# Altium PCB adc_pcb_board.PcbDoc
Units mm, origin at the board's own origin, x right, y up, seen from the top; angles counter-clockwise.
Board outline 64.34 x 63.7 mm, 4 copper layers (Top Layer, Internal Plane 1, Internal Plane 2, Bottom Layer), stack 0.462 mm thick; 106 components, 77 nets, 439 pads, 78 vias.
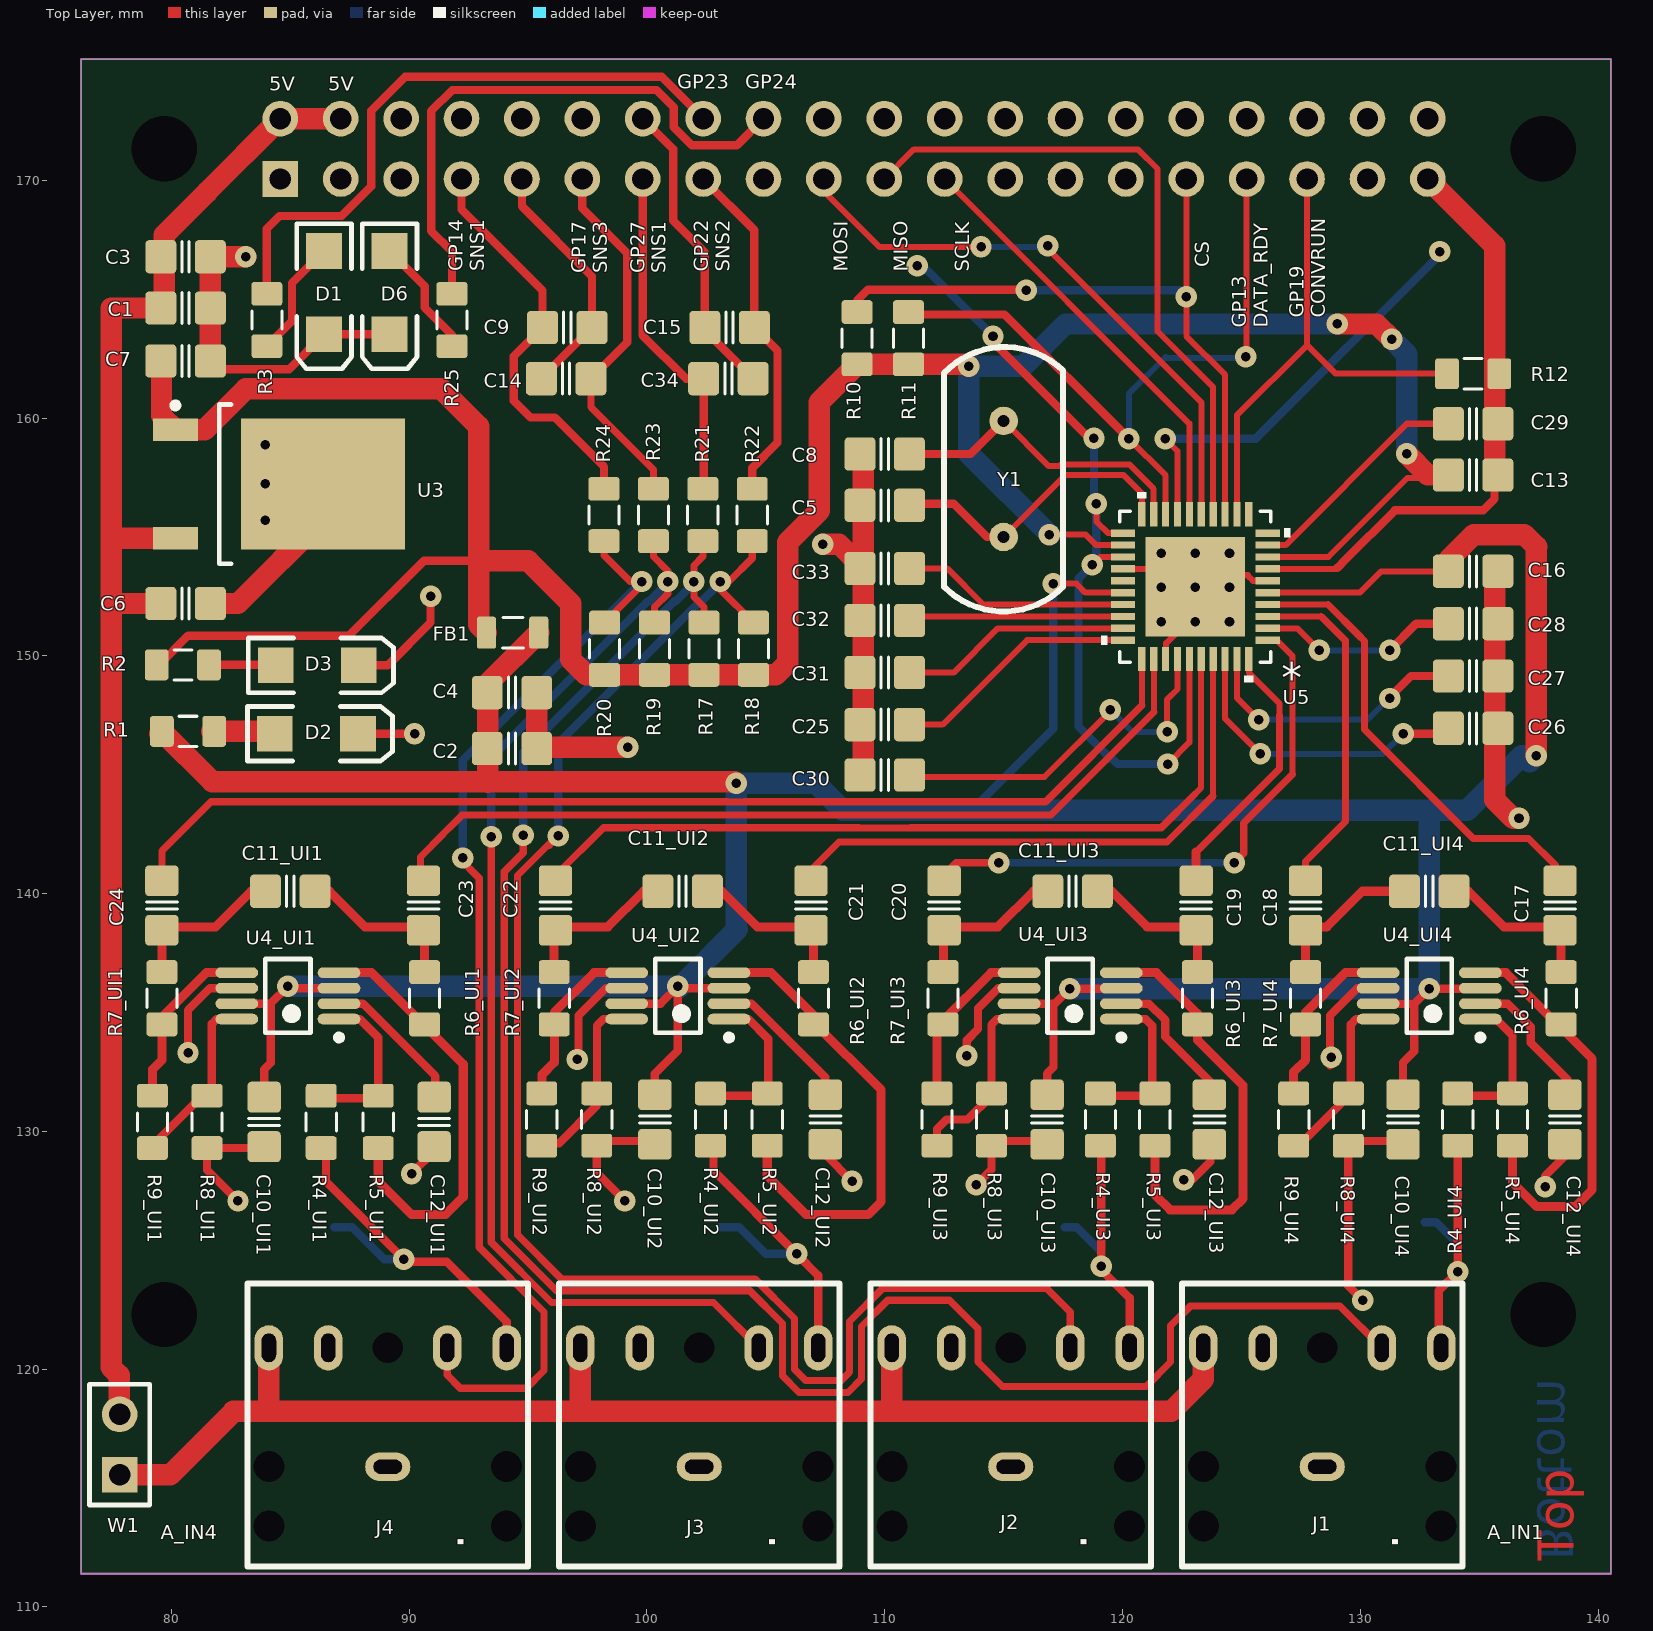
[diagram p0: Top Layer view]
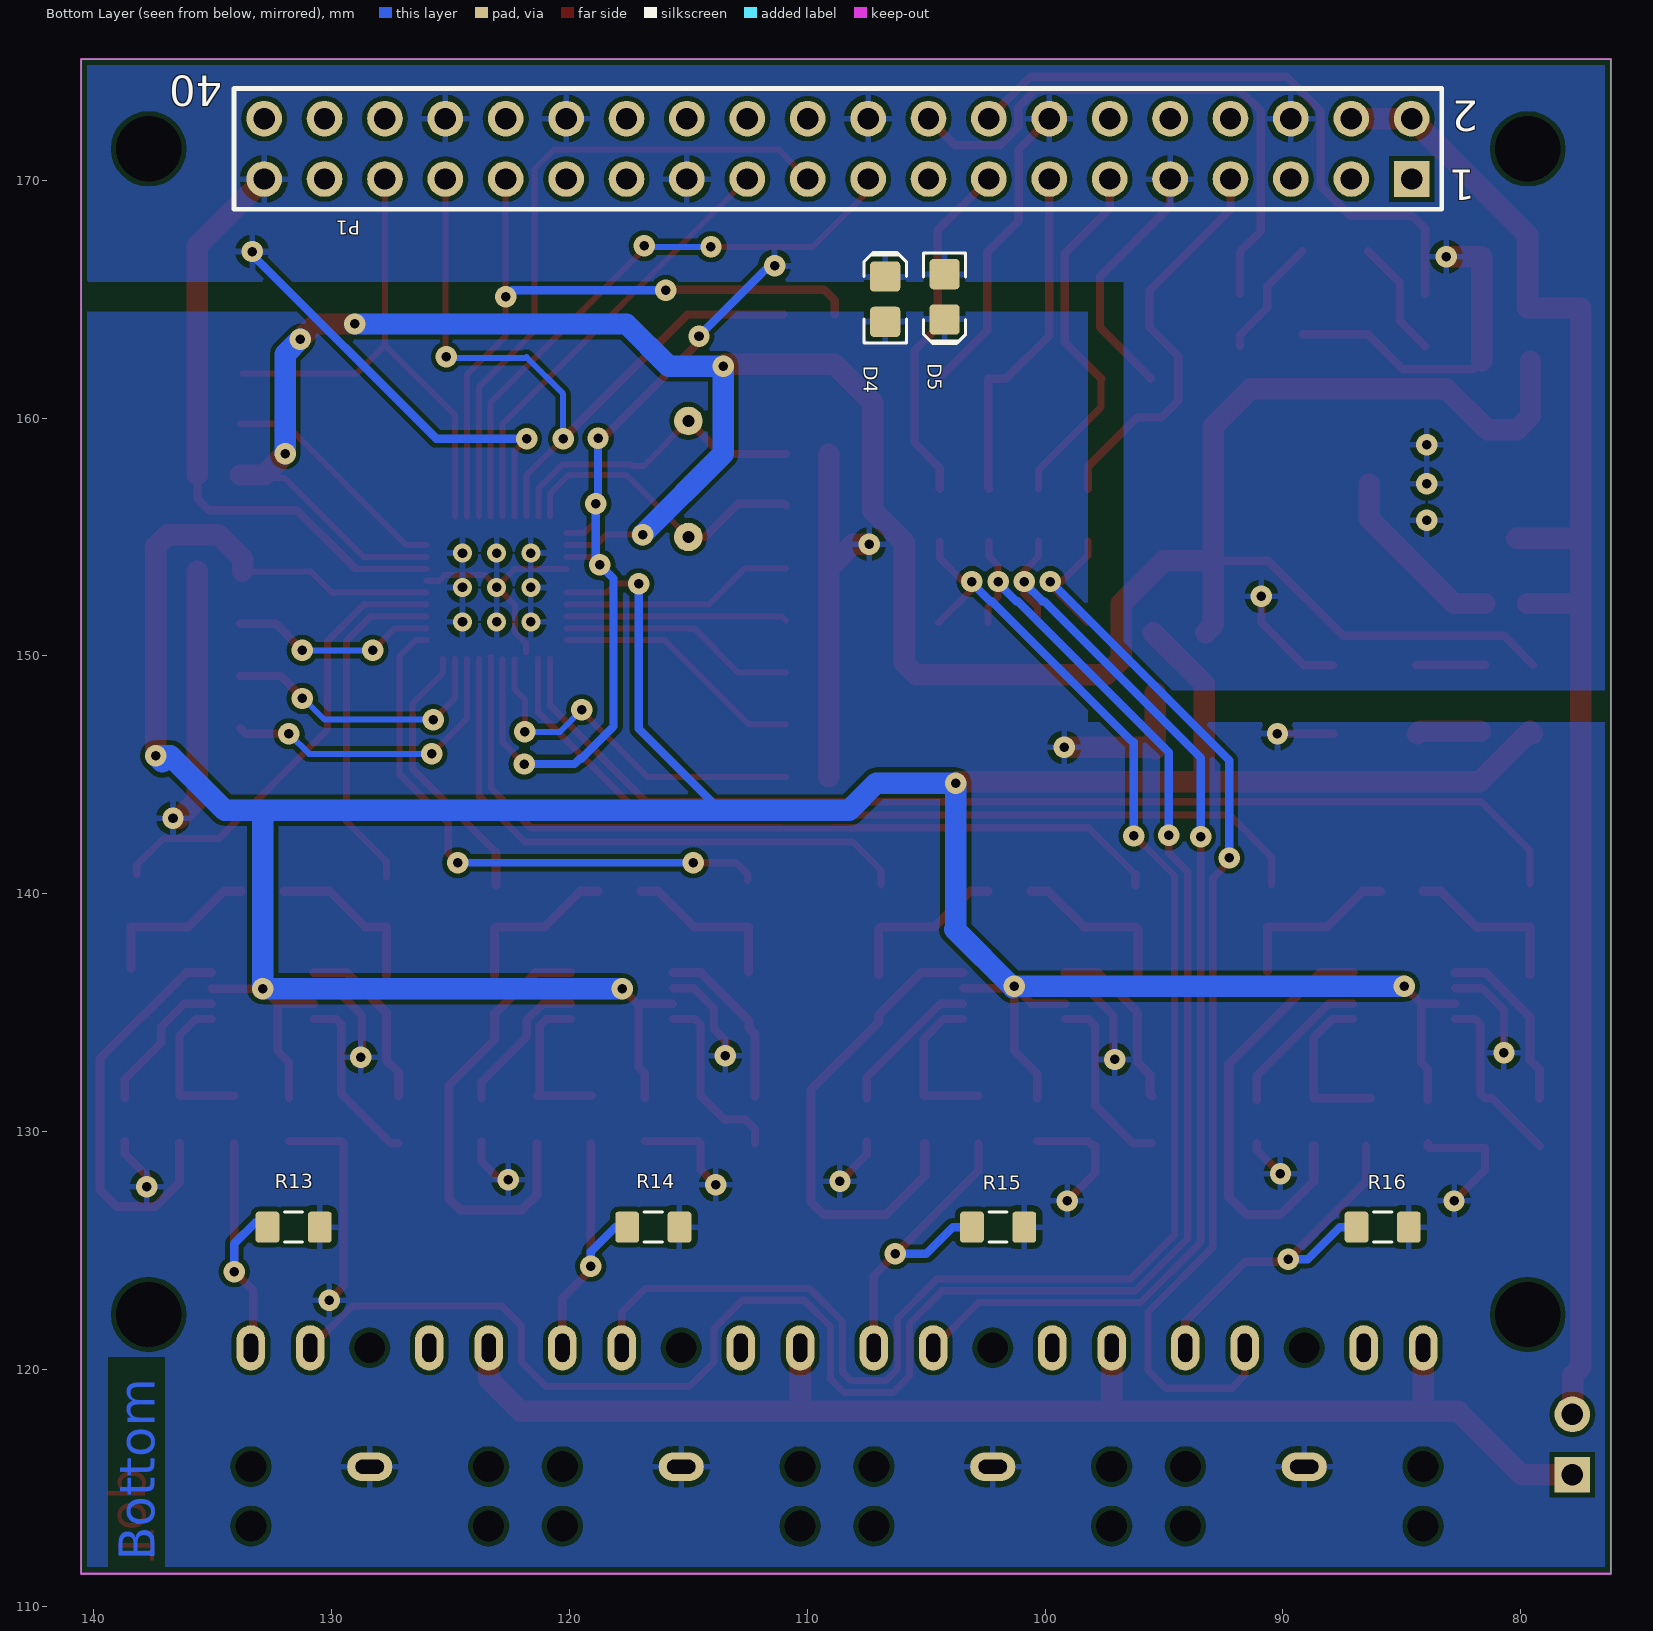
[diagram p1: Bottom Layer view, seen from below]
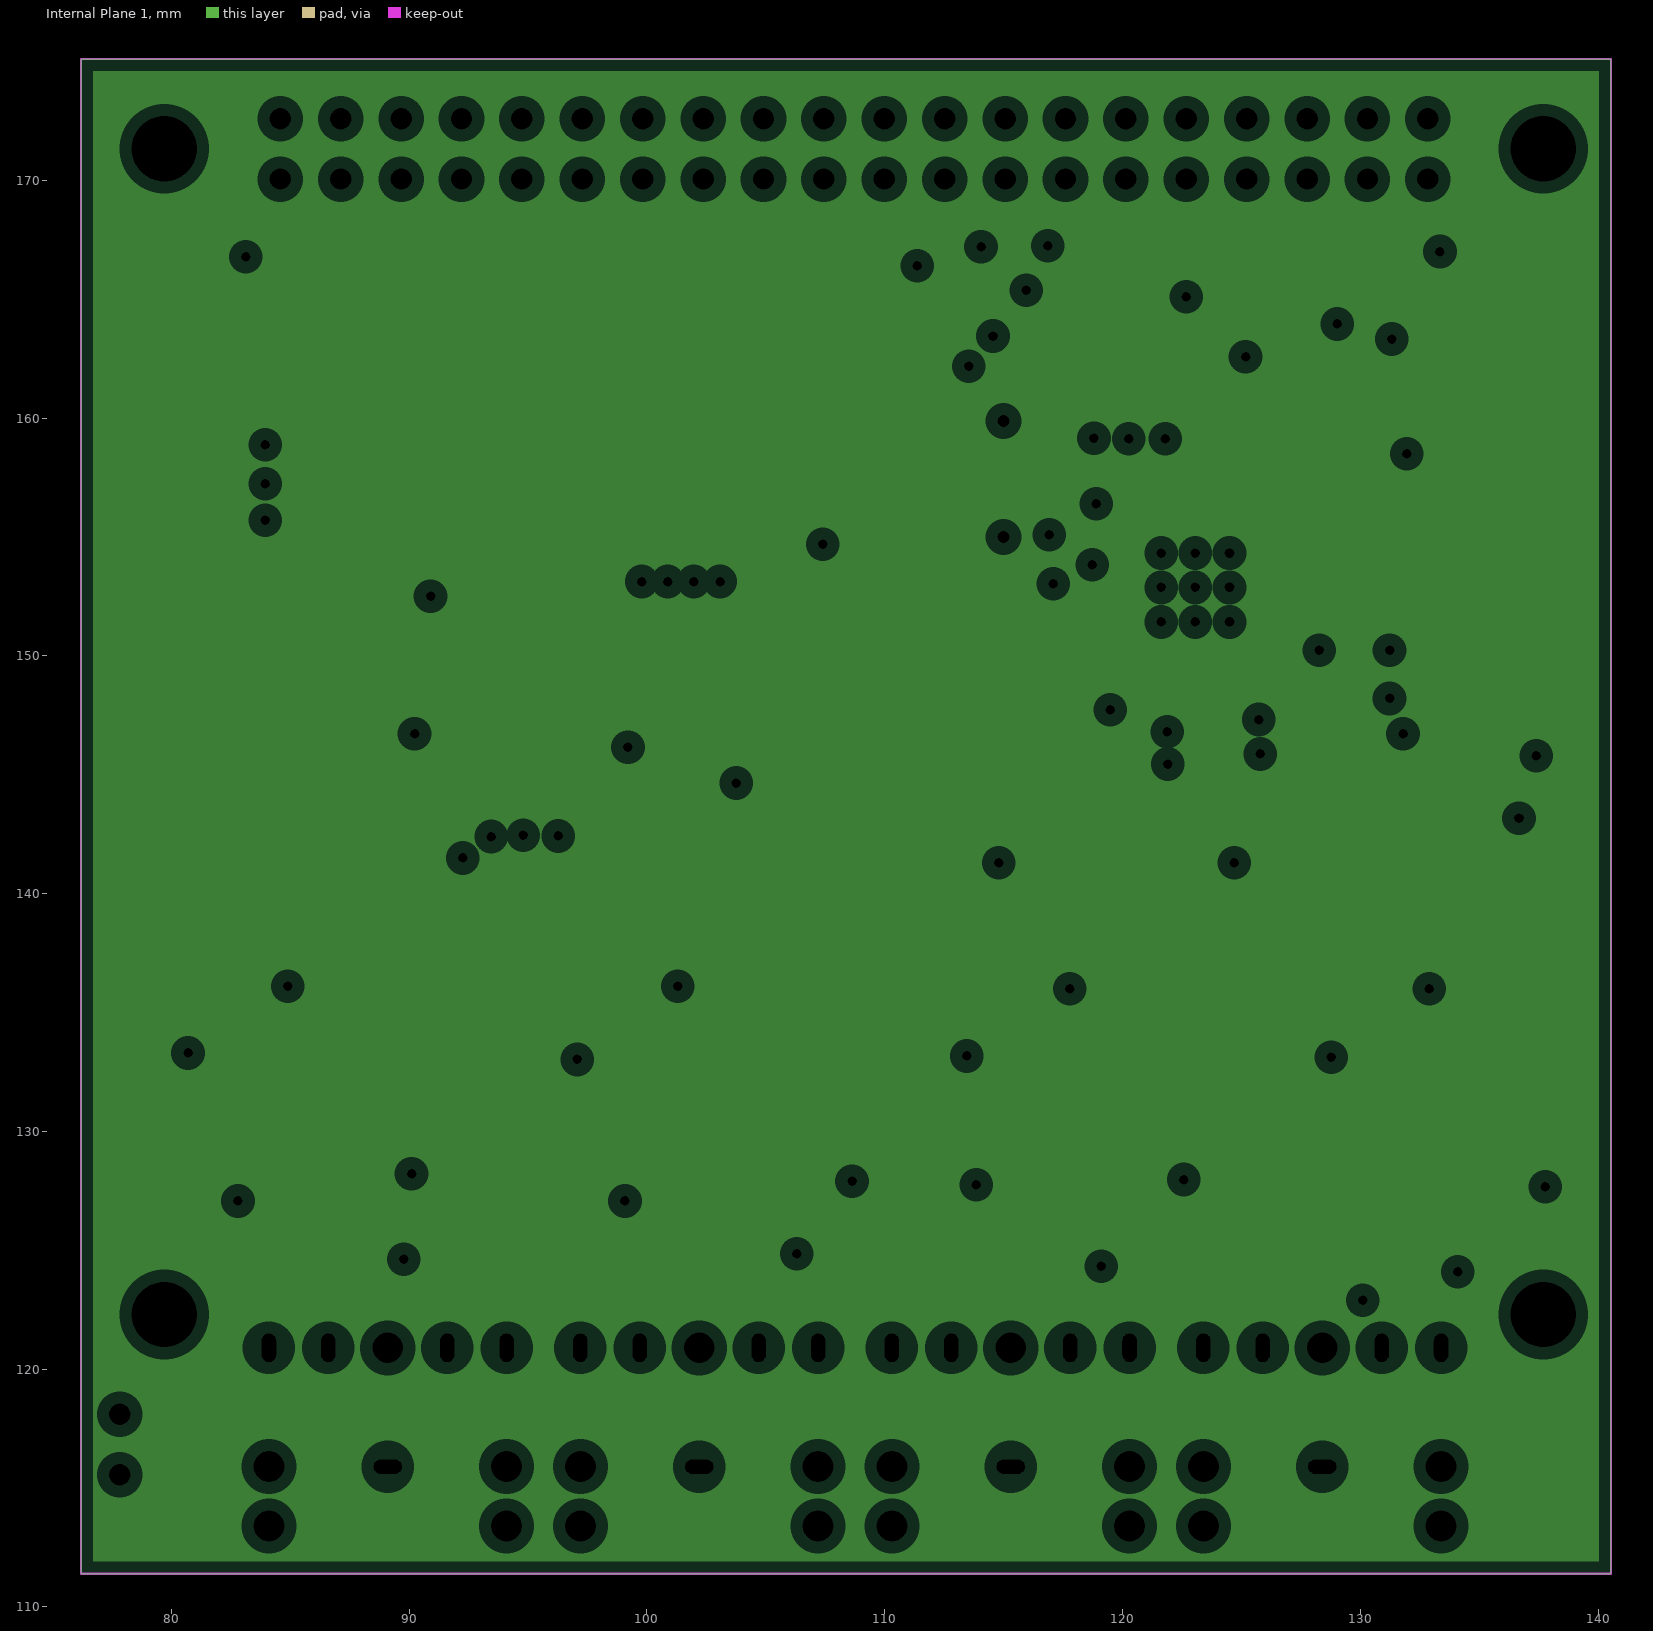
[diagram p2: Internal Plane 1, clearances drawn from the general rule]
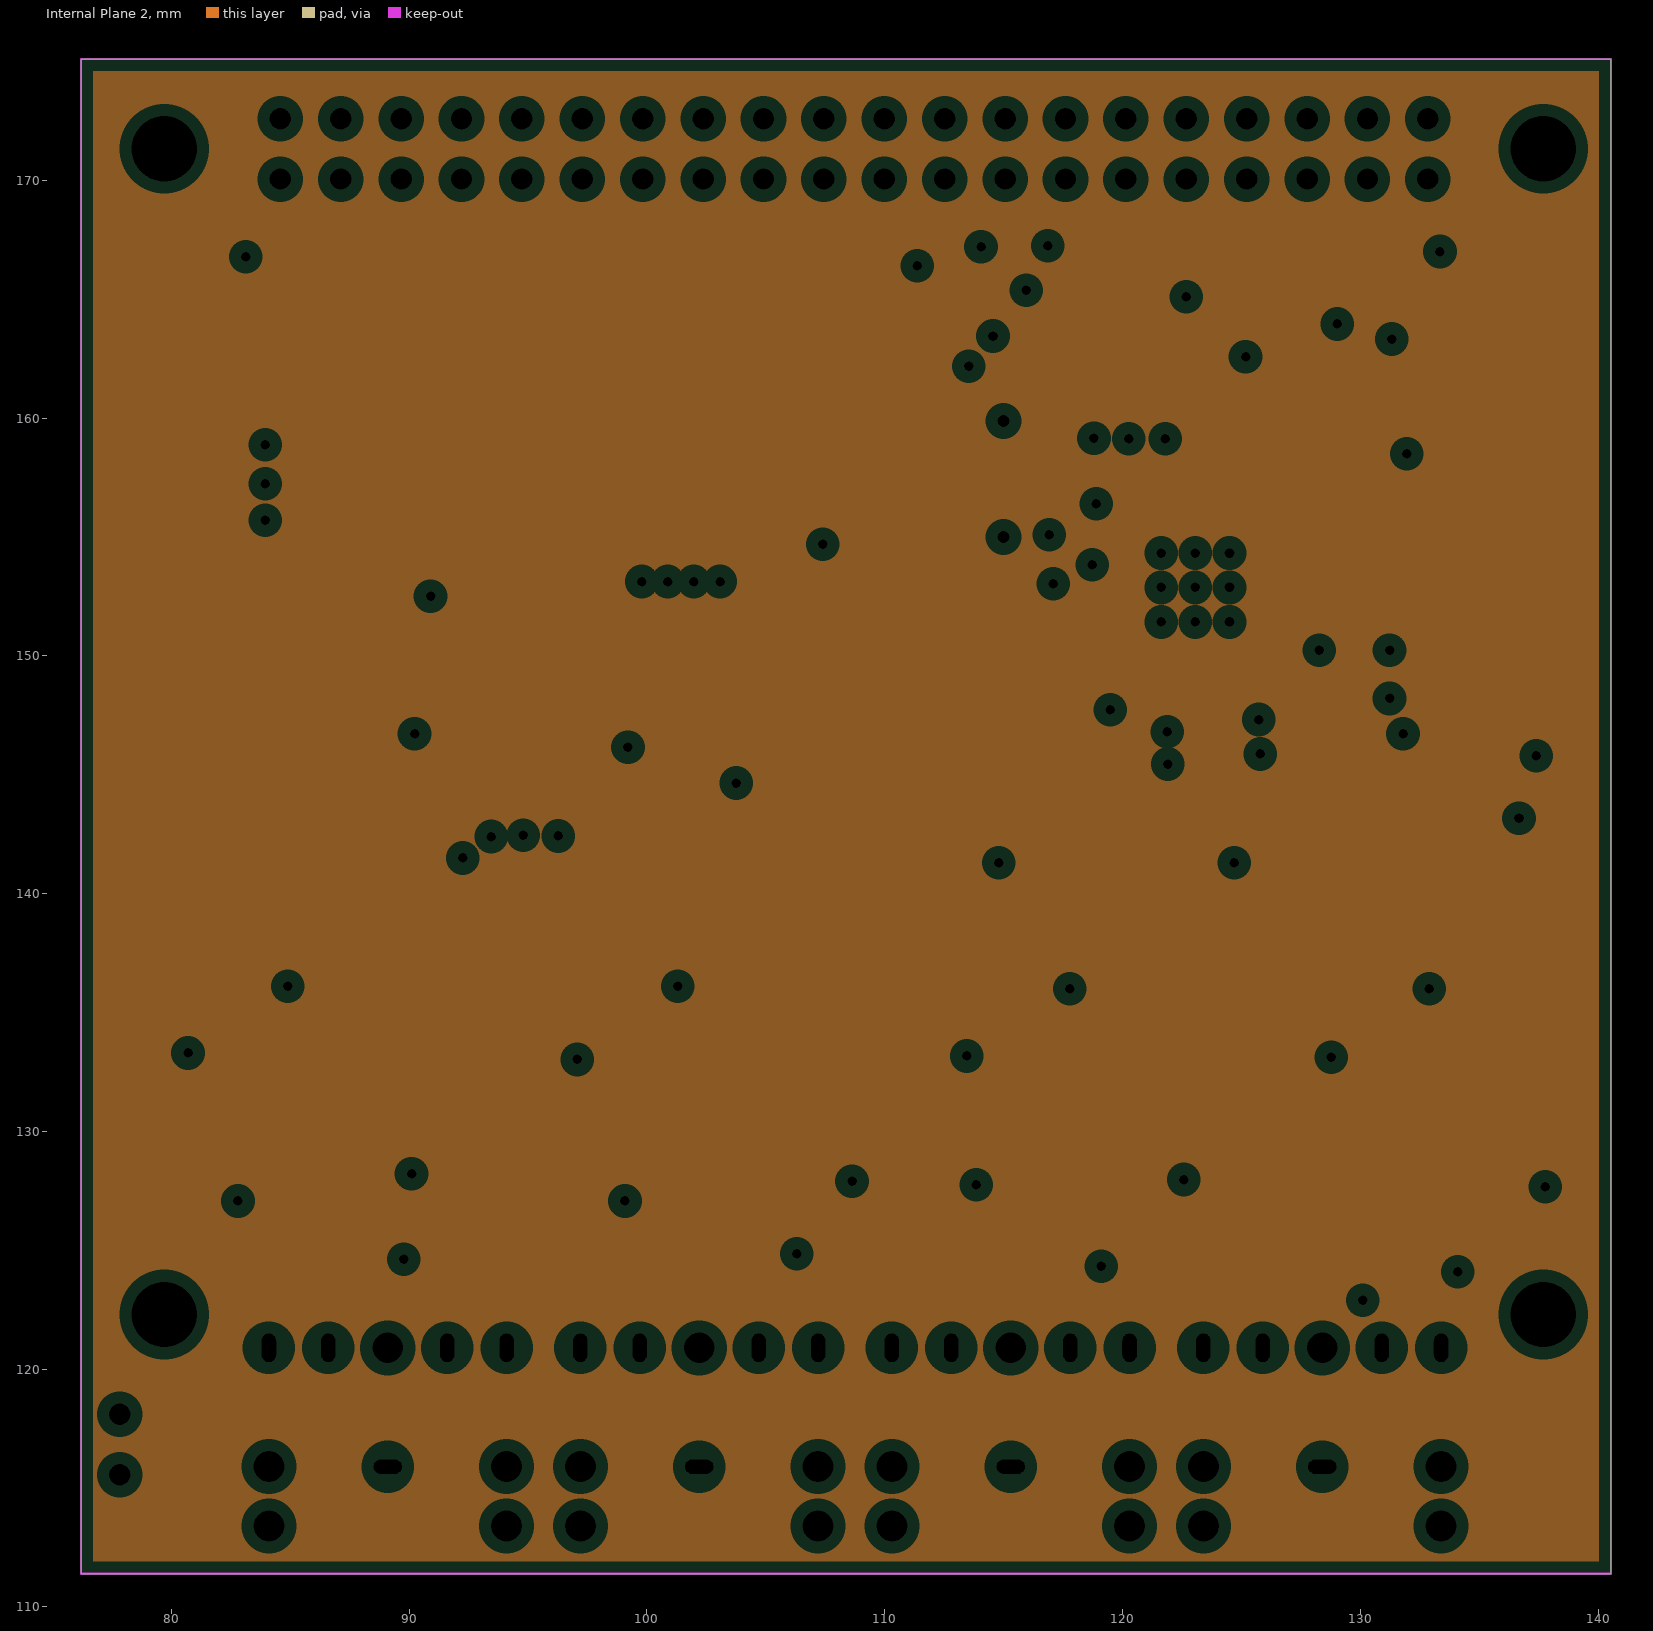
[diagram p3: Internal Plane 2, clearances drawn from the general rule]
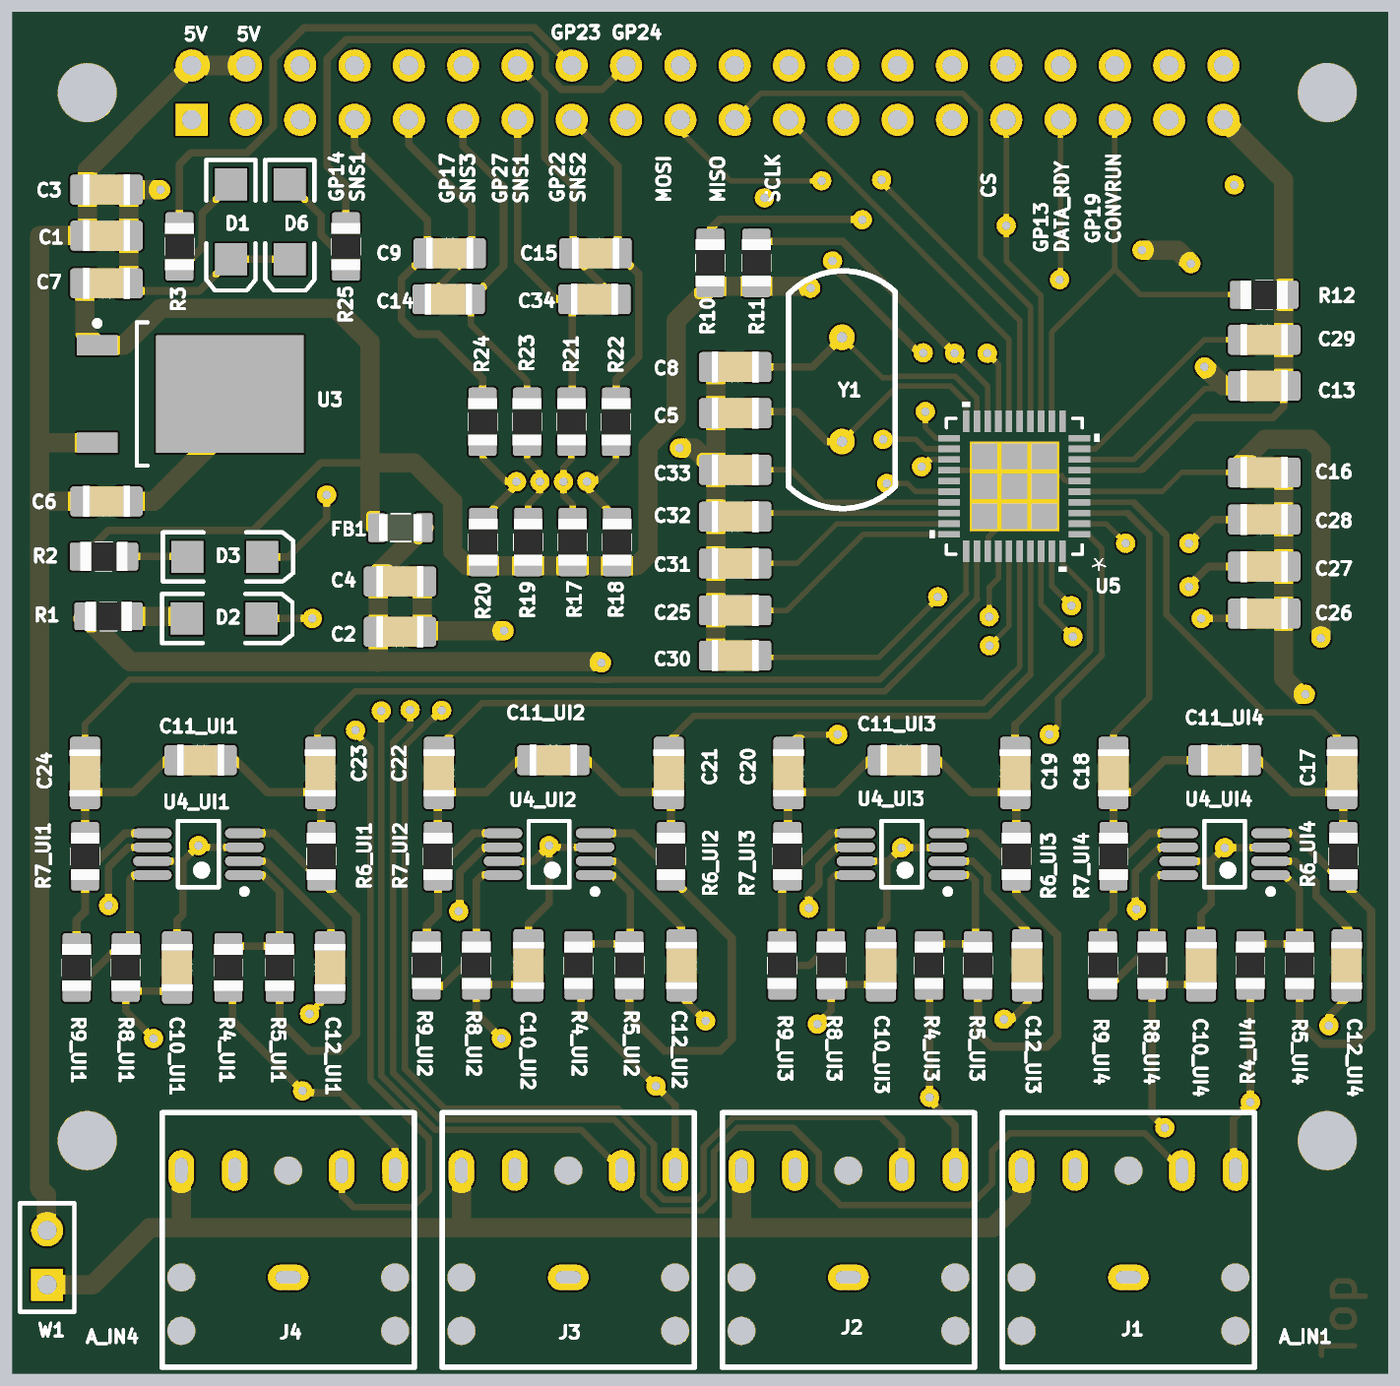
[diagram p4: 3D render of the assembled board from above, using the file's embedded part models]
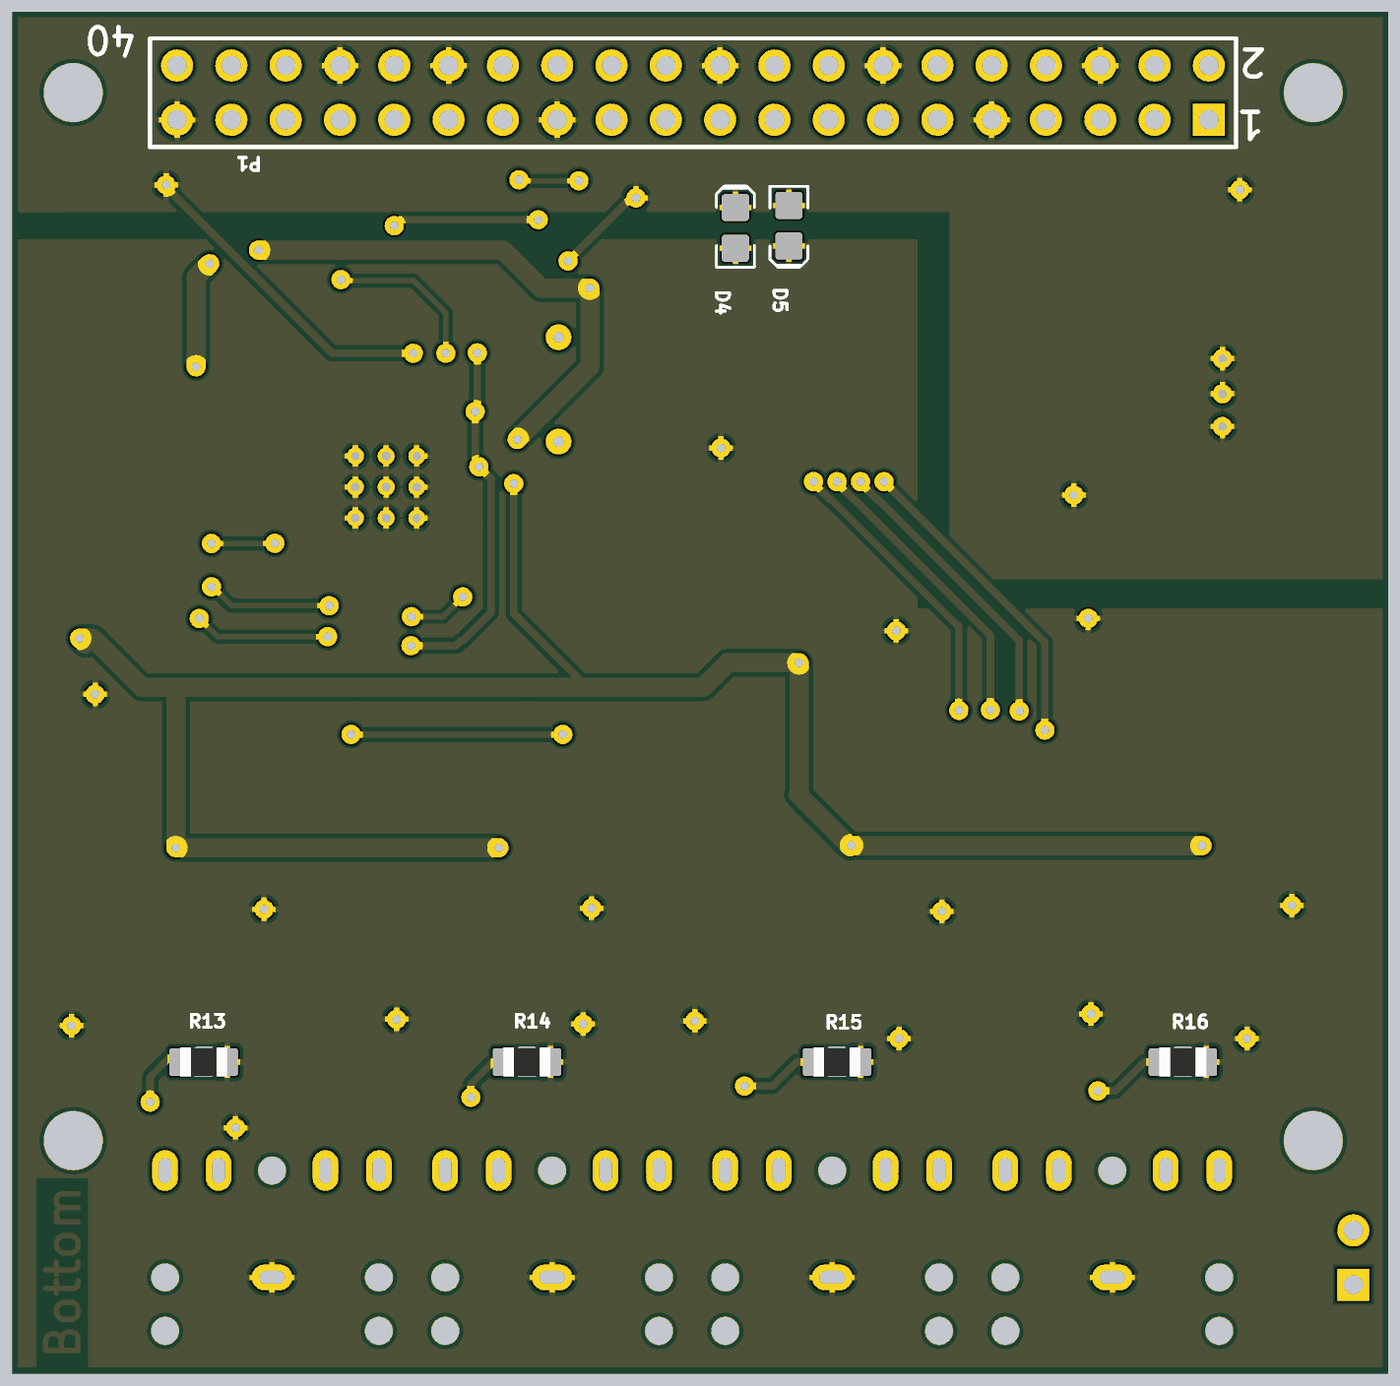
[diagram p5: 3D render of the assembled board from below, using the file's embedded part models]

## Layer stack, top to bottom
Top Solder: solder mask 0.0102, Solder Resist, Dk 3.5
Top Layer: signal copper 0.0356
Internal Plane 1: plane copper 0.0356
Internal Plane 2: plane copper 0.0356
Dielectric 1: dielectric 0.32, FR-4, Dk 4.8
Bottom Layer: signal copper 0.0356
Bottom Solder: solder mask 0.0102, Solder Resist, Dk 3.5

## Board outline
76.2,111.4 76.2,175.1 140.543,175.1 140.543,111.4

## Design rules (kind name [scope] priority, off if disabled: settings)
BoardOutlineClearance [All] p1: gap=0.127
Clearance [All] p1: gap=0.2 except(0.18: SMDPad-SMDPad)
DiffPairsRouting [All] p1: maxlimit=0.254 minlimit=0.254 mostfreqgap=0.254 toplayer_minwidth=0.254 toplayer_maxwidth=0.381 toplayer_prefwidth=0.381 bottomlayer_minwidth=0.254 bottomlayer_maxwidth=0.381 bottomlayer_prefwidth=0.381 maxuncoupledlength=12.7
Height [All] p1: minheight=0 maxheight=40 prefheight=12.7
HoleSize [All] p1: absolutevalues=TRUE maxlimit=10 minlimit=0.25 maxpercent=80.000 minpercent=20.000
MinimumAnnularRing "Minimum Annular Ring" [All] p1: minimumring=0.2
MinimumSolderMaskSliver [All] p1: minsoldermaskwidth=0.127
PlaneClearance [All] p1: clearance=0.508
PlaneConnect [All] p1: planeconnectstyle=Relief reliefexpansion=0.508 reliefentries=4 reliefconductorwidth=0.254 reliefairgap=0.254
PolygonConnect [All] p1: connectstyle=Relief reliefconductorwidth=0.254 reliefentries=4 polygonreliefangle="90 Angle" airgapwidth=0.254
RoutingVias [All] p1: holewidth=0.4 width=0.9 viastyle="Blind Buried (Adjacent Layers)" minholewidth=0.3 minwidth=0.5 maxholewidth=0.711 maxwidth=1.2
SilkToSolderMaskClearance [IsPad] p1: minsilkscreentomaskgap=0.156 clearancetoexposedcopper=TRUE
SolderMaskExpansion [All] p1: expansion=0.102
Width [All] p1: maxlimit=0.9 minlimit=0.254 preferedwidth=0.35
Width Power_lines [(InNet('A3V3') OR InNet('A5V') OR InNet('D3V3') OR InNet('A_GND') OR InNet('GND'))] p2: maxlimit=0.9 minlimit=0.5 preferedwidth=0.6
23 further rules are at their usual default settings.

## Classes and differential pairs
component class U_PowerSupply: C1 C2 C3 C4 C6 C7 D2 D3 D4 D5 FB1 R1 R2 U3
channel class InputDriver: UI1 UI2 UI3 UI4
component class UI4: C10_UI4 C11_UI4 C12_UI4 R4_UI4 R5_UI4 R6_UI4 R7_UI4 R8_UI4 R9_UI4 U4_UI4
component class UI3: C10_UI3 C11_UI3 C12_UI3 R4_UI3 R5_UI3 R6_UI3 R7_UI3 R8_UI3 R9_UI3 U4_UI3
component class UI2: C10_UI2 C11_UI2 C12_UI2 R4_UI2 R5_UI2 R6_UI2 R7_UI2 R8_UI2 R9_UI2 U4_UI2
component class UI1: C10_u1 C10_UI1 C11_UI1 C12_UI1 R4_UI1 R5_UI1 R6_UI1 R7_UI1 R8_UI1 R9_UI1 U4_UI1
component class U_ADC_connections: C5 C8 C13 C16 C17 C18 C19 C20 C21 C22 C23 C24 C25 C26 C27 C28 C29 C30 C31 C32 C33 R10 R11 R12 U5 Y1
component class TopLevel: C9 C14 C15 C34 D1 D6 J1 J2 J3 J4 P1 R3 R13 R14 R15 R16 R17 R18 R19 R20 R21 R22 R23 R24 R25 W1
differential pair AMP_UI4: +AMP_UI4_P -AMP_UI4_N
differential pair AMP_UI3: +AMP_UI3_P -AMP_UI3_N
differential pair AMP_UI2: +AMP_UI2_P -AMP_UI2_N
differential pair AMP_UI1: +AMP_UI1_P -AMP_UI1_N
differential pair D_IN: +D_IN_P -D_IN_N
differential pair C_IN: +C_IN_P -C_IN_N
differential pair B_IN: +B_IN_P -B_IN_N
differential pair A_IN: +A_IN_P -A_IN_N
differential pair ADC_IN_UI4: +ADC_IN_UI4_P -ADC_IN_UI4_N
differential pair ADC_IN_UI3: +ADC_IN_UI3_P -ADC_IN_UI3_N
differential pair ADC_IN_UI2: +ADC_IN_UI2_P -ADC_IN_UI2_N
differential pair ADC_IN_UI1: +ADC_IN_UI1_P -ADC_IN_UI1_N

## Components (designator, comment, footprint, x,y, rotation, side; value= is the part's Value field where it differs from the comment)
C1 "approved sub OK" CAPC2012X135N 80.6,164.63 r0 top
C2 "approved sub OK" CAPC2012X135N 94.325,146.1 r0 top
C3 "approved sub OK" CAPC2012X135N 80.6,166.785 r0 top
C4 "approved sub OK" CAPC2012X135N 94.325,148.454 r0 top
C5 "approved sub OK" CAPC2012X135N 110.003,156.331 r180 top
C6 "approved sub OK" CAPC2012X135N 80.6,152.2 r0 top
C7 "approved sub OK" CAPC2012X135N 80.6,162.4 r0 top
C8 "approved sub OK" CAPC2012X135N 110.003,158.486 r180 top
C9 "approved sub OK" CAPC2012X135N 96.65,163.812 r0 top
C10_UI1 "100n" CAPC2012X135N 83.9,130.4 r270 top (schematic designator C10)
C10_UI2 "100n" CAPC2012X135N 100.33,130.5 r270 top (schematic designator C10)
C10_UI3 "100n" CAPC2012X135N 116.83,130.5 r270 top (schematic designator C10)
C10_UI4 "100n" CAPC2012X135N 131.8,130.5 r270 top (schematic designator C10)
C11_UI1 "47p" CAPC2012X135N 85,140.1 r180 top (schematic designator C11)
C11_UI2 "47p" CAPC2012X135N 101.5,140.1 r180 top (schematic designator C11)
C11_UI3 "47p" CAPC2012X135N 117.9,140.1 r180 top (schematic designator C11)
C11_UI4 "47p" CAPC2012X135N 132.9,140.1 r180 top (schematic designator C11)
C12_UI1 "100n" CAPC2012X135N 91.05,130.4 r270 top (schematic designator C12)
C12_UI2 "100n" CAPC2012X135N 107.5,130.5 r270 top (schematic designator C12)
C12_UI3 "100n" CAPC2012X135N 123.65,130.5 r270 top (schematic designator C12)
C12_UI4 "100n" CAPC2012X135N 138.6,130.5 r270 top (schematic designator C12)
C13 "approved sub OK" CAPC2012X135N 134.747,157.607 r0 top
C14 "approved sub OK" CAPC2012X135N 96.6,161.658 r180 top
C15 "approved sub OK" CAPC2012X135N 103.475,163.812 r180 top
C16 "approved sub OK" CAPC2012X135N 134.747,153.554 r0 top
C17 "approved sub OK" CAPC2012X135N 138.4,139.5 r90 top
C18 "approved sub OK" CAPC2012X135N 127.7,139.5 r90 top
C19 "approved sub OK" CAPC2012X135N 123.1,139.5 r270 top
C20 "approved sub OK" CAPC2012X135N 112.5,139.5 r90 top
C21 "approved sub OK" CAPC2012X135N 106.9,139.5 r270 top
C22 "approved sub OK" CAPC2012X135N 96.15,139.5 r270 top
C23 "approved sub OK" CAPC2012X135N 90.6,139.5 r270 top
C24 "approved sub OK" CAPC2012X135N 79.6,139.5 r270 top
C25 "approved sub OK" CAPC2012X135N 110.003,147.105 r180 top
C26 "approved sub OK" CAPC2012X135N 134.747,146.955 r0 top
C27 "approved sub OK" CAPC2012X135N 134.747,149.154 r0 top
C28 "approved sub OK" CAPC2012X135N 134.747,151.354 r0 top
C29 "approved sub OK" CAPC2012X135N 134.747,159.761 r180 top
C30 "approved sub OK" CAPC2012X135N 110.003,144.989 r180 top
C31 "approved sub OK" CAPC2012X135N 110.003,149.295 r180 top
C32 "approved sub OK" CAPC2012X135N 110.003,151.486 r180 top
C33 "approved sub OK" CAPC2012X135N 110.003,153.677 r180 top
C34 "approved sub OK" CAPC2012X135N 103.425,161.658 r0 top
D1 "LED2" 3.2X1.6X1.1 86.421,165.275 r270 top
D2 "LED2" 3.2X1.6X1.1 86.1,146.725 r0 top
D3 "LED2" 3.2X1.6X1.1 86.137,149.6 r0 top
D4 "D Schottky" LED-0805-A 106.725,165 r90 bottom
D5 "D Schottky" LED-0805-A 104.225,165.1 r270 bottom
D6 "LED2" 3.2X1.6X1.1 89.175,165.275 r270 top
FB1 "220 at 100MHz" FBC2012N 94.35,150.975 r0 top
J1 "Phonejack3 TN" "SJ1-352XN FEMALE JACK" 128.4,115.9 r90 top
J2 "Phonejack3 TN" "SJ1-352XN FEMALE JACK" 115.3,115.9 r90 top
J3 "Phonejack3 TN" "SJ1-352XN FEMALE JACK" 102.2,115.9 r90 top
J4 "Phonejack3 TN" "SJ1-352XN FEMALE JACK" 89.1,115.9 r90 top
P1 "Header 20X2" HDR2X20 84.582,170.053 r0 bottom
R1 "Thick Film" RESC2012X70N 80.7,146.825 r0 top
R2 "Thick Film" RESC2012X70N 80.481,149.621 r0 top
R3 "Thick Film" RESC2012X70N 84.017,164.125 r270 top
R4_UI1 "Thick Film" RESC2012X70N 86.3,130.4 r90 top (schematic designator R4)
R4_UI2 "Thick Film" RESC2012X70N 102.67,130.5 r90 top (schematic designator R4)
R4_UI3 "Thick Film" RESC2012X70N 119.07,130.5 r90 top (schematic designator R4)
R4_UI4 "Thick Film" RESC2012X70N 134.1,130.5 r90 top (schematic designator R4)
R5_UI1 "Thick Film" RESC2012X70N 88.7,130.4 r270 top (schematic designator R5)
R5_UI2 "Thick Film" RESC2012X70N 105.06,130.5 r270 top (schematic designator R5)
R5_UI3 "Thick Film" RESC2012X70N 121.36,130.5 r270 top (schematic designator R5)
R5_UI4 "Thick Film" RESC2012X70N 136.4,130.5 r270 top (schematic designator R5)
R6_UI1 "Thick Film" RESC2012X70N 90.65,135.6 r90 top (schematic designator R6)
R6_UI2 "Thick Film" RESC2012X70N 107,135.6 r90 top (schematic designator R6)
R6_UI3 "Thick Film" RESC2012X70N 123.15,135.6 r90 top (schematic designator R6)
R6_UI4 "Thick Film" RESC2012X70N 138.45,135.6 r90 top (schematic designator R6)
R7_UI1 "Thick Film" RESC2012X70N 79.6,135.6 r90 top (schematic designator R7)
R7_UI2 "Thick Film" RESC2012X70N 96.1,135.6 r90 top (schematic designator R7)
R7_UI3 "Thick Film" RESC2012X70N 112.45,135.6 r90 top (schematic designator R7)
R7_UI4 "Thick Film" RESC2012X70N 127.7,135.6 r90 top (schematic designator R7)
R8_UI1 "Thick Film" RESC2012X70N 81.5,130.4 r90 top (schematic designator R8)
R8_UI2 "Thick Film" RESC2012X70N 97.89,130.5 r90 top (schematic designator R8)
R8_UI3 "Thick Film" RESC2012X70N 114.49,130.5 r90 top (schematic designator R8)
R8_UI4 "Thick Film" RESC2012X70N 129.5,130.5 r90 top (schematic designator R8)
R9_UI1 "Thick Film" RESC2012X70N 79.2,130.4 r90 top (schematic designator R9)
R9_UI2 "Thick Film" RESC2012X70N 95.575,130.5 r90 top (schematic designator R9)
R9_UI3 "Thick Film" RESC2012X70N 112.2,130.5 r90 top (schematic designator R9)
R9_UI4 "Thick Film" RESC2012X70N 127.2,130.5 r90 top (schematic designator R9)
R10 "Thick Film" RESC2012X70N 108.839,163.359 r90 top
R11 "Thick Film" RESC2012X70N 110.998,163.359 r90 top
R12 "Thick Film" RESC2012X70N 134.747,161.866 r0 top
R13 "Thick Film" RESC2012X70N 131.6,125.975 r180 bottom
R14 "Thick Film" RESC2012X70N 116.475,125.975 r180 bottom
R15 "Thick Film" RESC2012X70N 101.975,125.975 r180 bottom
R16 "Thick Film" RESC2012X70N 85.8,125.975 r180 bottom
R17 "Thick Film" RESC2012X70N 102.4,150.3 r90 top
R18 "Thick Film" RESC2012X70N 104.479,150.3 r90 top
R19 "Thick Film" RESC2012X70N 100.321,150.3 r90 top
R20 "Thick Film" RESC2012X70N 98.217,150.3 r90 top
R21 "Thick Film" RESC2012X70N 102.35,155.925 r270 top
R22 "Thick Film" RESC2012X70N 104.429,155.925 r270 top
R23 "Thick Film" RESC2012X70N 100.271,155.925 r270 top
R24 "Thick Film" RESC2012X70N 98.192,155.925 r270 top
R25 "Thick Film" RESC2012X70N 91.8,164.125 r270 top
U3 "LP38690DT-3.3" TD03B_N 84.518,157.226 r0 top
U4_UI1 "LT1994CMS8" LT-MS8-8_N 84.9,135.7 r180 top (schematic designator U4)
U4_UI2 "LT1994CMS8" LT-MS8-8_N 101.3,135.7 r180 top (schematic designator U4)
U4_UI3 "LT1994CMS8" LT-MS8-8_N 117.8,135.7 r180 top (schematic designator U4)
U4_UI4 "LT1994CMS8" LT-MS8-8_N 132.9,135.7 r180 top (schematic designator U4)
U5 "MAX11043ATL+" 21-0141I_T4066-5 123.063,152.908 r180 top
W1 "Jumper" HDR1X2 77.825,115.56 r90 top
Y1 "XTAL" "Quartz Crystal HC-49USSX" 115,155 r90 top

## Footprints (in the part's own frame and the unit in brackets; to place one, negate y for a bottom-side part, rotate by r counter-clockwise, add the part's x,y. Pads: shape width x height; smd on the part's side, far side on the other; paste and mask are expansions set on the pad)
3.2X1.6X1.1 [mm] "SMT LED; 2 Flat Leads"
  rect 1.5x1.5 smd: 1(-1.75,0) 2(1.75,0)
  silkscreen extent -2.9,-1.15 3.2,1.15
21-0141I_T4066-5 [mil]
  rect 39.88x12 smd paste+0 mask+0: 1(-119.92,88.58) 2(-119.92,68.9) 3(-119.92,49.21) 4(-119.92,29.53) 5(-119.92,9.84) 6(-119.92,-9.84) 7(-119.92,-29.53) 8(-119.92,-49.21) 9(-119.92,-68.9) 10(-119.92,-88.58) 21(119.92,-88.58) 22(119.92,-68.9) 23(119.92,-49.21) 24(119.92,-29.53) 25(119.92,-9.84) 26(119.92,9.84) 27(119.92,29.53) 28(119.92,49.21) 29(119.92,68.9) 30(119.92,88.58)
  rect 12x39.88 smd paste+0 mask+0: 11(-88.58,-119.92) 12(-68.9,-119.92) 13(-49.21,-119.92) 14(-29.53,-119.92) 15(-9.84,-119.92) 16(9.84,-119.92) 17(29.53,-119.92) 18(49.21,-119.92) 19(68.9,-119.92) 20(88.58,-119.92) 31(88.58,119.92) 32(68.9,119.92) 33(49.21,119.92) 34(29.53,119.92) 35(9.84,119.92) 36(-9.84,119.92) 37(-29.53,119.92) 38(-49.21,119.92) 39(-68.9,119.92) 40(-88.58,119.92)
  rect 165x165 smd paste-82 mask+0: 41(0,0)
  silkscreen extent -157,-156 156,158, body extent 0,0 10,10, height 10
CAPC2012X135N [mm] "Chip Capacitor, Body 2.0x1.2mm, EIA 0805, IPC Medium Density"
  round 0.254 on Mech15: 0(0,0)
  rrect25% 1.3x1.4 smd: 1(-1.041,0) 2(1.041,0)
  Top Layer pour cut-out: -0.675,0.7 -0.475,0.9 0.475,0.9 0.675,0.7 0.675,-0.7 0.475,-0.9 -0.475,-0.9 -0.675,-0.7
  silkscreen extent -0.15,-0.65 0.15,0.65, body extent -1.1,-0.72 1.1,0.73, height 1.34
FBC2012N [mm] "Ferrite Bead Chip, Body 2.0x1.2mm, 0805, IPC Medium Density"
  round 0.508 on Mech15: 0(0,0)
  rrect25% 0.8x1.35 smd: 1(-1.1,0) 2(1.1,0)
  silkscreen extent -0.43,-0.64 0.46,0.64, body extent -1,-0.62 1,0.63, height 0.9
HDR1X2 [mm] "Connector; Header; 2 Position"
  rect 1.5x1.5 hole 0.9: 1(0,0)
  round 1.5 hole 0.9: 2(2.54,0)
  silkscreen extent -1.27,-1.27 3.81,1.27
HDR2X20 [mm] "Connector; Header; 20x2 Position"
  rect 1.5x1.5 hole 0.9: 1(0,0)
  round 1.5 hole 0.9: 2(0,-2.54) 3(2.54,0) 4(2.54,-2.54) 5(5.08,0) 6(5.08,-2.54) 7(7.62,0) 8(7.62,-2.54) 9(10.16,0) 10(10.16,-2.54) 11(12.7,0) 12(12.7,-2.54) 13(15.24,0) 14(15.24,-2.54) 15(17.78,0) 16(17.78,-2.54) 17(20.32,0) 18(20.32,-2.54) 19(22.86,0) 20(22.86,-2.54) 21(25.4,0) 22(25.4,-2.54) 23(27.94,0) 24(27.94,-2.54) 25(30.48,0) 26(30.48,-2.54) 27(33.02,0) 28(33.02,-2.54) 29(35.56,0) 30(35.56,-2.54) 31(38.1,0) 32(38.1,-2.54) 33(40.64,0) 34(40.64,-2.54) 35(43.18,0) 36(43.18,-2.54) 37(45.72,0) 38(45.72,-2.54) 39(48.26,0) 40(48.26,-2.54)
  silkscreen extent -1.27,-3.81 49.53,1.27
LED-0805-A [mil]
  round 20 on Mech15: 0(0,0)
  rrect25% 50x50 smd: A(-37.5,0) K(37.5,0)
  Top Layer pour cut-out: -15,30 15,30 15,-30 -15,-30
  silkscreen extent -72,-35 77,35, body extent -39,-25 39,25, height 31
LT-MS8-8_N [mm] "SOP, 8-Leads, Body 3x3mm, Pitch 0.65mm, IPC Medium Density"
  oval 1.8x0.45 smd: 1(-2.15,0.975) 2(-2.15,0.325) 3(-2.15,-0.325) 4(-2.15,-0.975) 5(2.15,-0.975) 6(2.15,-0.325) 7(2.15,0.325) 8(2.15,0.975)
  silkscreen extent -2.28,-1.55 0.95,1.87, body extent -1.55,-1.55 1.55,1.55, height 1.1
"Quartz Crystal HC-49USSX" [mm]
  round 1.2 hole 0.5: 1(0,0) 2(4.88,0)
  silkscreen extent -3.13,-2.5 7.99,2.5
RESC2012X70N [mm] "Chip Resistor, Body 2.0x1.2mm, EIA 0805, IPC Medium Density"
  round 0.254 on Mech15: 0(0,0)
  rrect25% 1x1.3 smd: 1(-1.1,0) 2(1.1,0)
  Top Layer pour cut-out: -0.725,0.65 -0.525,0.85 0.525,0.85 0.725,0.65 0.725,-0.65 0.525,-0.85 -0.525,-0.85 -0.725,-0.65
  silkscreen extent -0.38,-0.64 0.38,0.64, body extent -1.1,-0.67 1.1,0.68, height 0.69
"SJ1-352XN FEMALE JACK" [mm]
  oval 1.2x1.9 hole 0.6 slot 1.2 at 90 deg: 1(0,0)
  oval 1.9x1.2 hole 0.6 slot 1.2 at 0 deg: 2(5,-5) 3(5,5) 10(5,-2.5) 11(5,2.5)
  round 0 hole 1.3: 6(5,0) 7(0,5) 8(0,-5) 9(-2.5,5) 12(-2.5,-5)
  silkscreen extent -4.2,-5.9 7.7,5.9
TD03B_N [mm] "D-PAK, 4-Leads, Body 6.1x6.6mm, Pitch 2.29mm, Lead Span 9.7mm, IPC Medium Density"
  rect 1.9x0.95 smd: 1(-4.35,2.28) 3(-4.35,-2.28)
  rect 6.9x5.5 smd: 4(1.85,0)
  silkscreen extent -4.47,-3.35 -2,3.43, body extent -2.5,-3.35 3.7,3.35, height 2.38

## Part data
C1 C2: library part CAPC_100n_0805_X7R_50V_10%, "Capacitor SMD Cer 100nF 10% 50V X7R 0805"
C3 C4 C6 C7 C13 C16 C25 C26 C27 C28 C30 C31 C32 C33: library part CAPC_1u_0805_X7R_16V_10%, "Capacitor SMD Cer 1uF 10% 16V X7R 0805"
C5 C8: library part CAPC_27p_0805_NP0_50V_5%, "Capacitor SMD Cer 22pF 5% 50V NP0 0805"
C9 C14 C15 C34: library part CAPC_100n_0805_X7R_100V_10%, "Capacitor SMD Cer 100nF 10% 100V X7R 0805"
C10_UI1 C10_UI2 C10_UI3 C10_UI4 C12_UI1 C12_UI2 C12_UI3 C12_UI4: library part CAPC_100n_0402_X5R_16V_10%, "Capacitor SMD Cer 100nF 10% 16V X5R 0402"
C11_UI1 C11_UI2 C11_UI3 C11_UI4: library part CAPC_39p_0603_NP0_50V_1%, "Capacitor SMD Cer 39pF 1% 50V NP0 0603"
C17 C18 C19 C20 C21 C22 C23 C24 C29: library part CAPC_10u_0805_10V, "Capacitor SMD Cer 10uF 10% 10V X5R 0805"
D1 D2 D3 D6: "Typical RED, GREEN, YELLOW, AMBER GaAs LED"
D4 D5: "Schottky Diode"
FB1: library part FERRITE_2K2-100MHz_0805, "Ferrite bead BLM21PG221SN1D 220 ohm at 100MHz 2A"
J1 J2 J3 J4: "Jack Socket, 1/4\" [6.5mm], Thru-Hole, Vertical, 3-Conductor with Tip closed & Ring open"
P1: "Header, 20-Pin, Dual row"
R1 R2 R3 R25: library part RES_1K3_0805_1%, "Resistor SMD chip 1.3k Ohm 0.125W 1% 0805"
R4_UI1 R4_UI2 R4_UI3 R4_UI4 R5_UI1 R5_UI2 R5_UI3 R5_UI4 R6_UI1 R6_UI2 R6_UI3 R6_UI4 R7_UI1 R7_UI2 R7_UI3 R7_UI4 R8_UI1 R8_UI2 R8_UI3 R8_UI4 R9_UI1 R9_UI2 R9_UI3 R9_UI4: library part RES_1K_0805_1%, "Resistor SMD chip 1k Ohm 0.125W 1% 0805"
R10 R11 R12 R13 R14 R15 R16: library part RES_10K_0805_1%, "Resistor SMD chip 10k Ohm 0.125W 1% 0805"
R17 R18 R19 R20: library part RES_100K_0805_1%, "Resistor SMD chip 100k Ohm 0.125W 1% 0805"
R21 R22 R23 R24: library part RES_51K_0805_1%, "Resistor SMD chip 51k Ohm 0.125W 1% 0805"
U3: "1A Low Dropout CMOS Linear Regulators, 3-pin TO-252"
U4_UI1 U4_UI2 U4_UI3 U4_UI4: "Single Channel, Low Noise, Low Distortion Fully Differential Input / Output Amplifier / Driver, 70 MHz Typical GBW, 65 V/us Typical SR, 2.375 to 12.6 V, 8-Pin SOP (MS8-8), Commercial"
U5: "Imported"
W1: "Jumper Wire"
Y1: "Crystal Oscillator"

## Free pads (board coordinates)
  round 0 hole 2.75: 0(137.7,171.323) 1(79.7,171.323) 2(79.7,122.3) 3(137.7,122.3)

## Via types
v1: diameter 0.9, hole 0.4, Top Layer to Bottom Layer, 69 vias
v2: diameter 0.8, hole 0.4, Top Layer to Bottom Layer, 9 vias

## Nets (pads, with @x,y where several pads share a name; then routed paths per layer and width w, separated by ;. In a path a pad name is that pad's centre, name@x,y a point inside that pad or via, vN(x,y) a via of type N, cw(c..) or ccw(c..) an arc to the next point about the centre after c; other vN are vias at no path point)
A3V3: C2.1 C4.1 C10_UI1.1 C10_UI2.1 C10_UI3.1 C10_UI4.1 C16.1 FB1.2 R1.1 U4_UI1.3 U4_UI1.7 U4_UI2.3 U4_UI2.7 U4_UI3.3 U4_UI3.7 U4_UI4.3 U4_UI4.7 U5.5 U5.26 | length 188.5
  Top Layer w0.254: v1(117.094,153.035) 118.065,153.035 118.442,152.658 U5.26@120.117,152.658 ; U5.5@126.009,152.658 129.979,152.658 130.875,153.554 C16.1 ; C16.1@133.628,153.335 C16.1@133.847,153.554
  Top Layer w0.35: U4_UI1.7 84.175,135.375 ; C10_UI1.1@83.9,131.3 83.9,132.6 84.175,132.875 84.175,135.375 ; U4_UI1.3 84.975,136.025 v1(84.9,136.1) 84.175,135.375 ; U4_UI2.7 100.575,135.375 v1(101.3,136.1) ; C10_UI2.1@100.33,131.4 100.33,132.43 101.3,133.4 v1(101.3,136.1) ; U4_UI2.3 101.375,136.025 v1(101.3,136.1) ; U4_UI3.7 117.1,135.375 117.1,132.7 116.83,132.43 C10_UI3.1@116.83,131.4 ; 117.162,135.375 v1(117.787,136) 119.925,136 U4_UI3.3 ; U4_UI4.7 132.275,135.375 ; C10_UI4.1@131.8,131.4 131.8,132.9 132.275,133.375 132.275,135.375 ; U4_UI4.3 135.025,136 v1(132.9,136) 132.275,135.375
  Top Layer w0.9: R1.1@79.5,146.725 R1.1 81.725,144.7 103.7,144.7 v1(103.75,144.65) ; 93.309,144.675 93.309,148.834 FB1.2 ; C16.1@133.735,153.554 133.735,154.066 134.769,155.1 136.9,155.1 137.414,154.586 137.4,154.572 v1(137.4,145.8)
  Bottom Layer w0.35: 113.665,143.51 117.094,146.939 v1(117.094,153.035)
  Bottom Layer w0.9: v1(84.9,136.1) v1(101.3,136.1) ; v1@101.35,136.05 103.8,138.5 103.75,138.55 v1(103.75,144.65) 107.1,144.65 108.24,143.51 113.665,143.51 132.9,143.51 ; v1(117.787,136) v1(132.9,136) 132.9,143.51 ; v1@137.134,145.534 v1(137.4,145.8) 136.79,145.8 134.5,143.51 132.9,143.51
A5V: C1.1 C3.1 C6.1 P1.2 P1.4 U3.3 W1.2 | length 65.8
  Top Layer w0.9: W1.2@77.65,118.1 77.8,118.25 77.8,119.75 77.475,120.075 77.475,164.63 79.7,164.63 79.7,167.7 81.5,169.5 81.5,169.511 P1.2 P1.4 ; 77.73,152.2 C6.1@79.7,152.2 ; 77.776,154.946 U3.3
A_GND: C2.2 C4.2 C5.2 C8.2 C10_UI1.2 C10_UI2.2 C10_UI3.2 C10_UI4.2 C12_UI1.2 C12_UI2.2 C12_UI3.2 C12_UI4.2 C16.2 C25.2 C26.2 C27.2 C28.2 C30.2 C31.2 C32.2 C33.2 D2.2 D4.A D5.K J1.1 J2.1 J3.1 J4.1 R8_UI1.1 R8_UI2.1 R8_UI3.1 R8_UI4.1 R13.2 R14.2 R15.2 R16.2 U4_UI1.6 U4_UI2.6 U4_UI3.6 U4_UI4.6 U5.6 U5.24 U5.33 U5.41 | length 95.5
  Top Layer w0.254: U5.24@120.117,153.658 122.313,153.658 U5.41 ; U5.33@121.834,150.17 121.834,150.534 122.3,151 122.3,152.145 U5.41 ; U5.6@126.009,153.158 125.488,153.158 125.488,153.179 125.467,153.179 125.276,153.37 125.276,153.4 123.555,153.4 U5.41
  Top Layer w0.35: v1(80.7,133.3) 80.7,135.1 81.625,136.025 U4_UI1.6 ; v1(82.8,127.075) 81.5,128.375 R8_UI1.1 83.841,129.3 C10_UI1.2 C10_UI1.2@83.9,129.5 ; D2.2 v1(90.225,146.725) ; v1(90.1,128.225) 91.1,129.225 C12_UI1.2@91.1,129.5 ; v1(97.075,133.025) 97.125,133.075 97.125,134.874 98.277,136.025 U4_UI2.6 ; R8_UI2.1 R8_UI2.1@97.89,129.3 ; v1(99.075,127.075) 97.89,128.26 R8_UI2.1@97.89,129.3 ; C10_UI2.2@100.33,129.6 98.19,129.6 R8_UI2.1@97.89,129.3 ; C12_UI2.2@107.5,129.6 107.5,129.025 v1(108.625,127.9) ; v1(113.45,133.175) 113.45,133.828 113.925,134.303 113.925,135.174 114.777,136.025 U4_UI3.6 ; v1(113.85,127.75) 114.49,128.39 R8_UI3.1 ; R8_UI3.1@114.49,129.5 114.59,129.6 C10_UI3.2@116.83,129.6 ; v1(122.575,127.975) 122.95,127.975 123.7,128.725 C12_UI3.2@123.7,129.6 ; v1(128.775,133.125) 128.775,132.825 128.725,132.775 128.725,134.874 129.877,136.025 U4_UI4.6 ; v1(130.1,122.9) 129.5,123.5 129.5,129.5 129.6,129.6 C10_UI4.2@131.8,129.6 ; v1(137.775,127.675) 137.775,128.125 138.7,129.05 C12_UI4.2@138.7,129.6
  Top Layer w0.9: C4.2 C2.2 95.416,146.15 v1(99.2,146.15) ; v1(107.4,154.7) 108.076,154.7 109.101,153.675 C33.2@109.103,153.677 ; C30.2@109.103,144.914 C33.2@109.103,153.677 ; C8.2@109.103,158.485 C33.2@109.103,153.677 ; C16.2@135.647,153.554 135.647,143.953 136.425,143.175 v1(136.675,143.175)
  other v2: 121.625,151.425 123.062,151.425 124.5,151.425 121.625,152.875 123.062,152.875 124.5,152.875 121.625,154.325 123.062,154.325 124.5,154.325
A_IN_N: C18.2 U5.3 | length 14.4
  Top Layer w0.254: U5.3@126.009,151.658 128.355,151.658
  Top Layer w0.3: C18.2@127.7,140.7 127.7,141.35 129.378,143.028 129.378,150.636 128.356,151.658
A_IN_P: C17.2 U5.4 | length 19.3
  Top Layer w0.254: U5.4@126.009,152.158 128.639,152.158
  Top Layer w0.3: 128.639,152.158 129.932,150.865 130.175,150.622 130.175,146.9 134.752,142.323 137.077,142.323 138.2,141.2 C17.2@138.2,140.8
ADC_IN_UI1_N: C11_UI1.2 C24.2 R7_UI1.2 | length 7.1
  Top Layer w0.381: R7_UI1.2@79.6,136.6 79.6,138.6 81.859,138.6 83.36,140.1 C11_UI1.2@84.1,140.1
ADC_IN_UI1_P: C11_UI1.1 C23.2 R6_UI1.2 | length 7.2
  Top Layer w0.381: C11_UI1.1@85.9,140.1 86.64,140.1 88.141,138.6 90.65,138.6 R6_UI1.2@90.65,136.75
ADC_IN_UI2_N: C11_UI2.2 C22.2 R7_UI2.2 | length 7.1
  Top Layer w0.381: R7_UI2.2@96.1,136.6 96.1,138.5 96.2,138.6 98.359,138.6 99.86,140.1 C11_UI2.2@100.6,140.1
ADC_IN_UI2_P: C11_UI2.1 C21.2 R6_UI2.2 | length 7.2
  Top Layer w0.381: C11_UI2.1@102.4,140.1 103.14,140.1 104.641,138.6 106.9,138.6 107,138.5 R6_UI2.2@107,136.6
ADC_IN_UI3_N: C11_UI3.2 C20.1 R7_UI3.2 | length 7
  Top Layer w0.381: R7_UI3.2@112.475,136.7 112.475,138.6 114.759,138.6 116.26,140.1 C11_UI3.2@117,140.1
ADC_IN_UI3_P: C11_UI3.1 C19.2 R6_UI3.2 | length 6.9
  Top Layer w0.381: C11_UI3.1@118.8,140.1 119.541,140.1 121.041,138.6 123.1,138.6 123.15,138.55 R6_UI3.2@123.15,136.6
ADC_IN_UI4_N: C11_UI4.2 C18.1 R7_UI4.2 | length 6.9
  Top Layer w0.381: R7_UI4.2@127.7,136.6 127.7,138.6 128.59,138.6 130.091,140.1 C11_UI4.2@132,140.1
ADC_IN_UI4_P: C11_UI4.1 C17.1 R6_UI4.2 | length 7
  Top Layer w0.381: C11_UI4.1@133.8,140.1 134.541,140.1 136.041,138.6 138.45,138.6 R6_UI4.2@138.45,136.85
AMP_UI1_N: R7_UI1.1 R9_UI1.2 U4_UI1.5 | length 7.5
  Top Layer w0.381: R9_UI1.2@79.2,131.4 79.2,132.6 79.6,133 79.6,134.6 79.6,134.8 81.475,136.675 U4_UI1.5
AMP_UI1_P: R5_UI1.2 R6_UI1.1 U4_UI1.4 | length 18.4
  Top Layer w0.381: U4_UI1.4 88.425,136.675 92.275,132.825 92.275,127.25 91.525,126.5 90.1,126.5 88.7,127.9 R5_UI1.2@88.7,129.4
AMP_UI2_N: R7_UI2.1 R9_UI2.2 U4_UI2.5 | length 7.5
  Top Layer w0.381: R9_UI2.2@95.5,131.5 95.588,131.587 95.588,132.388 96.108,132.908 96.108,135.008 97.775,136.675 U4_UI2.5
AMP_UI2_P: R5_UI2.2 R6_UI2.1 U4_UI2.4 | length 20.4
  Top Layer w0.381: U4_UI2.4 105.225,136.675 107,134.9 107,134.6 109.85,131.75 109.85,127.05 109.3,126.5 106.7,126.5 105.06,128.14 R5_UI2.2@105.06,129.5
AMP_UI3_N: R7_UI3.1 R9_UI3.2 U4_UI3.5 | length 7.3
  Top Layer w0.381: R9_UI3.2@112.2,131.5 112.2,134.1 112.45,134.35 112.45,134.65 114.475,136.675 U4_UI3.5
AMP_UI3_P: R5_UI3.2 R6_UI3.1 U4_UI3.4 | length 18.8
  Top Layer w0.381: U4_UI3.4 121.425,136.675 123.15,134.95 123.15,134.6 123.15,133.85 125.075,131.925 125.075,127.175 124.6,126.7 122,126.7 121.36,127.34 R5_UI3.2@121.36,129.5
AMP_UI4_N: R7_UI4.1 R9_UI4.2 U4_UI4.5 | length 7.5
  Top Layer w0.381: R9_UI4.2@127.2,131.5 127.2,132.5 127.7,133 127.7,135 129.375,136.675 U4_UI4.5
AMP_UI4_P: R5_UI4.2 R6_UI4.1 U4_UI4.4 | length 17.4
  Top Layer w0.381: U4_UI4.4 136.125,136.675 139.75,133.05 139.75,127.55 139.034,126.834 137.427,126.834 136.4,127.861 R5_UI4.2@136.4,129.5
B_IN_N: C20.2 U5.1 | length 23.8
  Top Layer w0.254: U5.1@126.009,150.658 126.479,150.658 127.154,149.983 127.154,145.021
  Top Layer w0.3: C20.2@112.515,140.556 112.5,140.571 112.5,140.8 113,141.3 v1(114.8,141.3) ; v1(124.7,141.3) 125.1,141.7 125.1,142.967 127.154,145.021
  Bottom Layer w0.3: v1(114.8,141.3) v1(124.7,141.3)
B_IN_P: C19.1 U5.40 | length 11.5
  Top Layer w0.254: U5.40 125.313,149.287 126.6,148 126.6,147.5
  Top Layer w0.3: 123.1,141.75 126.6,145.25 126.6,147.5
  Top Layer w0.381: C19.1@123.1,140.371 123.1,141.75
C_IN_N: C22.1 U5.36 | length 34.6
  Top Layer w0.254: 123.054,144.195 123.054,144.205 123.305,144.456 123.305,149.637 123.292,149.65 123.292,149.937 U5.36@123.315,149.96
  Top Layer w0.3: C22.1@96.2,140.8 98.169,142.769 108.918,142.769 ; 108.926,142.762 111.08,142.762 ; 111.088,142.769 121.629,142.769 123.054,144.195
  Top Layer w0.381: C22.1@96.2,140.371 C22.1@96.2,140.8
C_IN_P: C21.1 U5.37 | length 24.6
  Top Layer w0.254: 123.813,144.113 U5.37
  Top Layer w0.3: C21.1@106.9,140.371 106.9,141 108.075,142.175 121.875,142.175 123.813,144.113
CONVRUN: P1.35 R12.1 U5.12 | length 21.9
  Top Layer w0.254: U5.12@124.813,155.854 124.813,160.119 127.762,163.068 ; P1.35 127.762,163.068 ; R12.1@133.747,161.866 128.964,161.866 127.762,163.068
CS: P1.31 R10.2 U5.13 | length 29.6
  Top Layer w0.254: P1.31 v1(122.682,165.1) 122.682,163.449 124.313,161.818 U5.13@124.313,155.854
  Top Layer w0.35: R10.2@108.839,164.359 108.839,164.939 109.3,165.4 115.925,165.4 v1(115.95,165.375)
  Bottom Layer w0.35: v1(115.95,165.375) 122.407,165.375 v1(122.682,165.1)
D3V3: C7.1 C13.1 FB1.1 R2.1 R10.1 R11.1 R17.1 R18.1 R19.1 R20.1 U3.1 U5.8 U5.22 | length 123.7
  Top Layer w0.254: v1(116.925,155.1) 118.45,155.1 118.892,154.658 U5.22@120.117,154.658 ; U5.8@126.009,154.158 128.658,154.158 131.98,157.48 133.72,157.48 C13.1@133.847,157.607
  Top Layer w0.35: R2.1@79.481,149.621 80.708,150.848 87.473,150.848 90.625,154 92.925,154
  Top Layer w0.9: C7.1@79.584,162.4 79.584,160.09 U3.1 81.406,159.506 83.125,161.225 91.35,161.225 92.925,159.65 92.925,154 ; FB1.1 92.925,151.3 92.925,154 ; v1(113.538,162.179) 113.458,162.259 R11.1 R10.1 107.25,160.67 107.25,156.106 105.925,154.781 105.925,149.7 105.425,149.2 R18.1 R17.1 R19.1 R20.1 97.45,149.2 96.8,149.85 96.8,152.2 95,154 92.925,154 ; v1(129.032,163.957) 130.683,163.957 v1(131.318,163.322) ; v1(131.953,158.496) 132.842,157.607 C13.1@133.847,157.607
  Bottom Layer w0.9: v1(116.925,155.1) 116.934,155.1 113.538,158.496 v1(113.538,162.179) 115.824,162.179 117.602,163.957 v1(129.032,163.957) ; v1(131.318,163.322) 131.953,162.687 v1(131.953,158.496)
D_IN_N: C24.1 U5.31 | length 47.1
  Top Layer w0.254: 120.813,147.908 U5.31
  Top Layer w0.3: C24.1@79.6,140.4 79.6,141.8 81.664,143.864 103.405,143.864 103.419,143.85 104.081,143.85 104.095,143.864 116.769,143.864 120.813,147.908
D_IN_P: C23.1 U5.32 | length 36.8
  Top Layer w0.254: 121.321,147.633 U5.32@121.321,149.862
  Top Layer w0.3: C23.1@90.471,140.371 90.471,141.546 91.425,142.5 91.425,142.506 91.894,142.975 91.9,142.975 92.235,143.31 116.998,143.31 121.321,147.633
DATA_READY: P1.33 R11.2 U5.18 | length 30.3
  Top Layer w0.254: v1(120.269,159.131) 121.813,157.587 U5.18@121.813,155.854 ; v1@125.075,162.525 125.222,162.672 P1.33
  Top Layer w0.35: R11.2@110.998,164.359 115.041,164.359 v1(120.269,159.131)
  Bottom Layer w0.254: v1(120.269,159.131) 120.269,161.019 121.81,162.56 121.845,162.525 v1@125.075,162.525
  other v1: 125.175,162.575
GND: C1.2 C3.2 C6.2 C7.2 C9.2 C13.2 C14.2 C15.2 C29.1 C34.2 D1.2 D3.2 D4.K D5.A D6.2 P1.6 P1.9 P1.14 P1.20 P1.25 P1.30 P1.34 P1.39 R12.2 U3.4 U5.7 U5.17 U5.21 U5.23 U5.35 | length 129.8
  Top Layer w0.254: v1(118.725,153.825) 119.058,154.158 U5.23@120.117,154.158 ; v1(118.9,156.4) 118.9,155.65 119.392,155.158 U5.21@120.117,155.158 ; v1(121.793,159.131) 122.313,158.611 U5.17@122.313,155.854 ; v1(121.9,145.45) 122.813,146.363 U5.35 ; U5.7@126.009,153.658 128.992,153.658 129.037,153.704
  Top Layer w0.35: C7.2 81.991,162.05 84.946,162.05 D1.2 D6.2 ; D3.2 89.1,149.6 90.9,151.4 v1(90.9,152.5) ; P1.9 94.742,168.908 97.691,165.959 C9.2 95.559,161.68 C14.2 ; P1.14 101.1,171.315 101.1,168.3 102.434,166.966 C15.2 102.434,163.69 C34.2 ; v1(114.554,163.449) 114.554,163.195 118.7,159.049 v1(118.8,159.149) ; 129.037,153.704 129.385,154.051 131.454,156.121 135.166,156.121 135.647,156.602 C13.2@135.647,157.607
  Top Layer w0.9: C6.2@81.5,152.2 82.8,152.2 86.368,155.768 U3.4 ; C7.2 C1.2 C3.2 v1(83.132,166.785) ; P1.39 135.647,167.248 C13.2@135.647,157.607
  Bottom Layer w0.35: v1(111.375,166.4) 111.603,166.4 v1(114.554,163.449) ; v1(118.725,153.825) 118.15,153.25 118.15,147.026 119.507,145.669 119.538,145.7 119.787,145.45 v1(121.9,145.45) ; v1(118.8,159.149) 118.8,156.5 v1(118.9,156.4) v1@118.9,154 ; v1(121.793,159.131) 125.603,159.131 133.35,166.878 v1(133.35,167.005)
  other v1: 83.95,155.7 83.95,157.238 83.95,158.877
GP_LED1: P1.16 R3.1 | length 26.3
  Top Layer w0.35: R3.1 84.017,167.967 84.55,168.5 87.16,168.5 88.4,169.74 88.4,172.922 89.828,174.35 100.628,174.35 102.362,172.616 P1.16
GP_LED2: P1.18 R25.1 | length 24.3
  Top Layer w0.35: R25.1 91.8,167 90.925,167.875 90.925,172.907 91.818,173.8 100.4,173.8 101.125,173.075 101.125,172.239 101.896,171.468 103.777,171.468 P1.18
JACKSENSE1: C34.1 P1.13 R21.1 | length 14.5
  Top Layer w0.35: P1.13 99.822,163.478 101.642,161.658 C34.1 102.384,157.059 R21.1
JACKSENSE2: C15.1 P1.15 R22.1 | length 14.8
  Top Layer w0.35: P1.15 104.516,167.899 C15.1 105.491,162.837 105.491,158.966 104.429,157.904 R22.1
JACKSENSE3: C14.1 P1.11 R23.1 | length 15.5
  Top Layer w0.3: C14.1 97.641,160.459 100.271,157.829 R23.1
  Top Layer w0.35: P1.11 97.282,168.818 99.175,166.925 99.175,163.192 C14.1
JACKSENSE4: C9.1 P1.7 R24.1 | length 17.1
  Top Layer w0.35: P1.7 92.202,168.773 95.609,165.366 C9.1 94.4,162.603 94.4,160.725 95.1,160.025 96.125,160.025 98.192,157.958 R24.1
JACKSWITCH1: J1.10 R17.2 R21.2 | length 84
  Top Layer w0.3: v1(94.8,142.45) 94.8,141.719 94,140.919 94,125.493 96.193,123.3 104.325,123.3 105.7,121.925 105.7,119.725 106.4,119.025 108.45,119.025 109.025,119.6 109.025,121.8 110.125,122.9 112.725,122.9 113.925,121.7 113.925,120.3 114.95,119.275 121,119.275 122.025,120.3 122.025,121.825 122.85,122.65 129.15,122.65 J1.10 ; R21.2 102.35,154.175 101.975,153.8 v1(101.975,153.125) 101.975,152.475 102.4,152.05 R17.2
  Bottom Layer w0.35: v1(94.8,142.45) 94.95,142.45 94.8,142.6 94.8,145.95 101.15,152.3 101.217,152.3 101.975,153.058 v1(101.975,153.125)
JACKSWITCH2: J2.10 R18.2 R22.2 | length 67.3
  Top Layer w0.3: 95.9,142.025 95.9,142.112 94.55,140.762 94.55,125.65 96.4,123.8 104.532,123.8 106.2,122.132 106.2,120 106.675,119.525 108.175,119.525 108.525,119.875 108.525,122.007 109.918,123.4 116.8,123.4 117.8,122.4 J2.10 ; R22.2 104.429,154.104 103.45,153.125 v1(103.075,153.125) 103.075,152.804 R18.2
  Bottom Layer w0.35: v1(96.275,142.425) 96.275,146.375 96.3,146.35 102.25,152.3 102.317,152.3 103.075,153.058 v1(103.075,153.125)
JACKSWITCH3: J3.10 R19.2 R23.2 | length 48
  Top Layer w0.3: v1(93.45,142.4) 93.45,125.336 95.986,122.8 102.8,122.8 J3.10 ; R23.2 100.271,154.175 100.875,153.571 v1(100.875,153.125) 100.875,152.604 100.321,152.05 R19.2
  Bottom Layer w0.35: v1@93.45,142.267 93.45,145.7 100.05,152.3 100.117,152.3 100.875,153.058 v1(100.875,153.125)
JACKSWITCH4: J4.10 R20.2 R24.2 | length 48.7
  Top Layer w0.3: J4.10 91.6,119.75 92.15,119.2 94.925,119.2 95.675,119.95 95.675,122.404 92.95,125.129 92.95,140.65 92.1,141.5 v1(92.25,141.5) ; R24.2 98.192,154.233 99.3,153.125 v1(99.775,153.125) 99.775,152.958 R20.2
  Bottom Layer w0.35: v1(92.25,141.5) 92.25,145.6 v1(99.775,153.125)
MISO: P1.21 U5.14 | length 27.9
  Top Layer w0.254: P1.21 111.229,171.3 120.65,171.3 121.475,170.475 121.475,163.64 123.813,161.302 U5.14@123.813,155.854
MOSI: P1.19 U5.15 | length 25
  Top Layer w0.254: P1.19 107.442,169.533 109.775,167.2 v1(114.05,167.2) ; v1(116.854,167.246) 116.854,167.118 123.313,160.659 U5.15@123.313,155.854
  Bottom Layer w0.254: v1(114.05,167.2) 116.808,167.2 v1(116.854,167.246)
NetC5_1: C5.1 U5.20 Y1.1 | length 12.9
  Top Layer w0.254: Y1.1 117.6,157.6 120.05,157.6 120.813,156.837 U5.20@120.813,155.854
  Top Layer w0.35: C5.1@110.903,156.331 110.972,156.4 112.9,156.4 114.3,155 Y1.1
NetC8_1: C8.1 U5.19 Y1.2 | length 13.4
  Top Layer w0.254: Y1.2 116.899,157.981 117.339,157.981 117.412,158.054 120.285,158.054 121.313,157.026 U5.19@121.313,155.854
  Top Layer w0.35: C8.1@110.903,158.486 113.606,158.486 Y1.2
NetC12_UI1_1: C12_UI1.1 U4_UI1.2 | length 6.3
  Top Layer w0.35: U4_UI1.2 88.05,135.375 91.1,132.325 C12_UI1.1@91.1,131.3
NetC12_UI2_1: C12_UI2.1 U4_UI2.2 | length 6.2
  Top Layer w0.35: U4_UI2.2 104.4,135.375 107.5,132.275 C12_UI2.1@107.5,131.4
NetC12_UI3_1: C12_UI3.1 U4_UI3.2 | length 6.2
  Top Layer w0.35: U4_UI3.2 121.103,135.375 121.8,134.678 121.8,133.975 123.7,132.075 C12_UI3.1@123.7,131.4
NetC12_UI4_1: C12_UI4.1 U4_UI4.2 | length 6.2
  Top Layer w0.35: U4_UI4.2 136.2,135.375 137.175,134.4 137.175,133.725 138.7,132.2 C12_UI4.1@138.7,131.4
NetC25_1: C25.1 U5.30 | length 10.7
  Top Layer w0.254: C25.1@110.903,147.105 112.434,147.105 115.987,150.658 U5.30@120.117,150.658
NetC26_1: C26.1 U5.38 | length 13.1
  Top Layer w0.254: U5.38 124.313,147.362 v1(125.8,145.875)
  Top Layer w0.35: v1(131.8,146.725) 133.617,146.725 C26.1@133.847,146.955
  Bottom Layer w0.254: v1(125.8,145.875) 130.95,145.875 v1(131.8,146.725)
NetC27_1: C27.1 U5.39 | length 11.8
  Top Layer w0.254: U5.39 124.813,148.237 v1(125.73,147.32)
  Top Layer w0.35: v1(131.231,148.207) 131.231,148.249 132.136,149.154 C27.1@133.847,149.154
  Bottom Layer w0.254: v1(125.73,147.32) 130.302,147.32 131.189,148.207 v1(131.231,148.207)
NetC28_1: C28.1 U5.2 | length 8.7
  Top Layer w0.254: U5.2@126.009,151.158 127.353,151.158 v1(128.27,150.241)
  Top Layer w0.35: v1(131.231,150.232) 132.353,151.354 C28.1@133.847,151.354
  Bottom Layer w0.254: v1(128.27,150.241) 128.279,150.232 v1(131.231,150.232)
NetC29_2: C29.2 U5.9 | length 10
  Top Layer w0.254: U5.9@126.009,154.658 126.858,154.658 131.961,159.761 C29.2@133.847,159.761
NetC30_1: C30.1 U5.34 | length 15.8
  Top Layer w0.254: C30.1@110.903,144.914 116.72,144.914 119.481,147.675 v1(119.481,147.732) ; v1(121.881,146.807) 121.881,148.17 122.313,148.602 U5.34
  Bottom Layer w0.254: v1(119.481,147.732) 119.481,147.727 120.401,146.807 v1(121.881,146.807)
NetC31_1: C31.1 U5.29 | length 10
  Top Layer w0.254: C31.1@110.903,149.295 112.895,149.295 114.758,151.158 U5.29@120.117,151.158
NetC32_1: C32.1 U5.28 | length 9.3
  Top Layer w0.254: C32.1@110.903,151.486 111.075,151.658 U5.28@120.117,151.658
NetC33_1: C33.1 U5.27 | length 9.8
  Top Layer w0.254: C33.1@110.903,153.677 112.623,153.677 114.142,152.158 U5.27@120.117,152.158
NetD1_1: D1.1 R3.2 | length 5
  Top Layer w0.35: R3.2 85.075,164.083 85.075,165.679 D1.1
NetD2_1: D2.1 R1.2 | length 2.7
  Top Layer w0.9: R1.2@81.7,146.825 84.25,146.825 D2.1
NetD3_1: D3.1 R2.2 | length 2.9
  Top Layer w0.35: R2.2@81.481,149.621 84.366,149.621 D3.1
NetD6_1: D6.1 R25.2 | length 5.1
  Top Layer w0.35: D6.1 90.65,165.55 90.65,164.65 91.8,163.5 R25.2
NetJ1_1: J1.2 R4_UI4.1 R13.1 | length 11.9
  Top Layer w0.35: J1.2 133.3,121 133.3,123.3 v1(134.1,124.1) R4_UI4.1 R4_UI4.1@134.1,129.5
  Bottom Layer w0.35: R13.1@132.7,126.175 133.2,126.175 134.1,125.275 v1(134.1,124.1)
NetJ1_3: J1.3 J2.3 J3.3 J4.3 W1.1 | length 56.9
  Top Layer w0.9: W1.1@77.65,115.56 79.96,115.56 82.612,118.212 82.6,118.225 84.2,118.225 ; J4.3 84.1,118.325 84.2,118.225 ; J3.3 97.2,118.425 97.4,118.225 ; J2.3 110.3,118.225 ; J1.3 123.4,119.575 122.05,118.225 110.3,118.225 ; 84.2,118.225 97.4,118.225 ; 97.4,118.225 110.3,118.225
NetJ2_1: J2.2 R4_UI3.1 R14.1 | length 11.7
  Top Layer w0.35: R4_UI3.1@119.1,129.5 119.1,124.2 120.3,123 J2.2
  Bottom Layer w0.35: R14.1 118.075,125.975 119.1,124.95 v1(119.1,124.325)
NetJ3_1: J3.2 R4_UI2.1 R15.1 | length 14
  Top Layer w0.35: R4_UI2.1@102.8,129.5 102.8,128.35 v1(106.3,124.85) 107.2,123.95 J3.2@107.2,121
  Bottom Layer w0.35: R15.1 103.875,125.975 105,124.85 v1(106.3,124.85)
NetJ4_1: J4.2 R4_UI1.1 R16.1 | length 16.1
  Top Layer w0.35: R4_UI1.1@86.5,129.4 86.5,127.9 89.875,124.525 91.575,124.525 94.1,122 J4.2
  Bottom Layer w0.35: R16.1@86.85,125.975 87.6,125.975 88.95,124.625 v1(89.775,124.625)
NetR4_UI1_2: R4_UI1.2 R5_UI1.1 U4_UI1.1 | length 6.9
  Top Layer w0.35: R4_UI1.2@86.3,131.4 88.7,131.4 88.7,133.947 87.922,134.725 U4_UI1.1
NetR4_UI2_2: R4_UI2.2 R5_UI2.1 U4_UI2.1 | length 6.7
  Top Layer w0.35: R4_UI2.2@102.8,131.5 105.1,131.5 105.1,133.897 104.272,134.725 U4_UI2.1
NetR4_UI3_2: R4_UI3.2 R5_UI3.1 U4_UI3.1 | length 6.7
  Top Layer w0.35: R4_UI3.2@119.07,131.5 121.36,131.5 121.25,131.61 121.25,134.45 120.975,134.725 U4_UI3.1
NetR4_UI4_2: R4_UI4.2 R5_UI4.1 U4_UI4.1 | length 6.5
  Top Layer w0.35: R4_UI4.2@134.1,131.5 136.4,131.5 136.4,134.025 135.7,134.725 U4_UI4.1
NetR8_UI1_2: R8_UI1.2 R9_UI1.1 U4_UI1.8 | length 7.5
  Top Layer w0.35: R9_UI1.1@79.2,129.4 81.2,131.4 81.5,131.4 81.7,131.6 81.7,134.525 81.9,134.725 U4_UI1.8
NetR8_UI2_2: R8_UI2.2 R9_UI2.1 U4_UI2.8 | length 7.8
  Top Layer w0.35: R9_UI2.1@95.5,129.5 96.3,129.5 97.9,131.1 97.9,134.45 98.175,134.725 U4_UI2.8
NetR8_UI3_2: R8_UI3.2 R9_UI3.1 U4_UI3.8 | length 7.7
  Top Layer w0.35: R9_UI3.1@112.2,129.5 112.2,130.1 112.6,130.5 113.49,130.5 114.49,131.5 114.49,134.49 114.725,134.725 U4_UI3.8
NetR8_UI4_2: R8_UI4.2 R9_UI4.1 U4_UI4.8 | length 7.4
  Top Layer w0.35: R9_UI4.1@127.2,129.5 127.5,129.5 129.6,131.6 129.6,134.5 129.825,134.725 U4_UI4.8
SCLK: P1.23 U5.16 | length 19
  Top Layer w0.254: P1.23@113.03,170.053 P1.23 122.813,159.762 U5.16@122.813,155.854
pads on no net: C1.0 C2.0 C3.0 C4.0 C5.0 C6.0 C7.0 C8.0 C9.0 C10_UI1.0 C10_UI2.0 C10_UI3.0 C10_UI4.0 C11_UI1.0 C11_UI2.0 C11_UI3.0 C11_UI4.0 C12_UI1.0 C12_UI2.0 C12_UI3.0 C12_UI4.0 C13.0 C14.0 C15.0 C16.0 C17.0 C18.0 C19.0 C20.0 C21.0 C22.0 C23.0 C24.0 C25.0 C26.0 C27.0 C28.0 C29.0 C30.0 C31.0 C32.0 C33.0 C34.0 D4.0 D5.0 FB1.0 J1.6 J1.7 J1.8 J1.9 J1.11 J1.12 J2.6 J2.7 J2.8 J2.9 J2.11 J2.12 J3.6 J3.7 J3.8 J3.9 J3.11 J3.12 J4.6 J4.7 J4.8 J4.9 J4.11 J4.12 P1.1 P1.3 P1.5 P1.8 P1.10 P1.12 P1.17 P1.22 P1.24 P1.26 P1.27 P1.28 P1.29 P1.32 P1.36 P1.37 P1.38 P1.40 R1.0 R2.0 R3.0 R4_UI1.0 R4_UI2.0 R4_UI3.0 R4_UI4.0 R5_UI1.0 R5_UI2.0 R5_UI3.0 R5_UI4.0 R6_UI1.0 R6_UI2.0 R6_UI3.0 R6_UI4.0 R7_UI1.0 R7_UI2.0 R7_UI3.0 R7_UI4.0 R8_UI1.0 R8_UI2.0 R8_UI3.0 R8_UI4.0 R9_UI1.0 R9_UI2.0 R9_UI3.0 R9_UI4.0 R10.0 R11.0 R12.0 R13.0 R14.0 R15.0 R16.0 R17.0 R18.0 R19.0 R20.0 R21.0 R22.0 R23.0 R24.0 R25.0 U5.10 U5.11 U5.25

## Polygon pours and split planes (outlines as drawn)
GND on Bottom Layer "Digital_GND" (solid, remove dead copper, pour order 8): 76.2,175.092 76.2,148.55 96.7,148.55 96.7,165.735 136.906,165.735 140.9,165.695 140.9,174.972
A_GND on Bottom Layer "Analog_GND" (solid, remove dead copper, pour order 12): 76.278,111.7 140.475,111.7 140.475,164.465 98.2,164.465 98.2,147.2 76.172,147.2

## Keep-outs
Keep-Out Layer:
  the board outline again, w0.1

## Other copper
Top Layer:
  text "Top" at 138.974,111.95 h1.52 r90
Bottom Layer:
  text "Bottom" at 137.45,111.95 h1.52 r270

## Silkscreen, mask and mechanical layers (free items; w line width, h text height)
Top Overlay:
  text "GP23" at 101.275,173.85 h0.6
  text "GP24" at 104.125,173.85 h0.6
  text "5V" at 84.125,173.775 h0.6
  text "5V" at 86.6,173.775 h0.6
  text "CS" at 123.65,166.35 h0.6 r90
  text "GP14 / SNS1" at 93.15,166.175 h0.6 r90
  text "GP22 / SNS2" at 103.475,166.15 h0.6 r90
  text "MOSI" at 108.45,166.15 h0.6 r90
  text "MISO" at 110.975,166.15 h0.6 r90
  text "SCLK" at 113.55,166.15 h0.6 r90
  text "GP17 / SNS3" at 98.325,166.1 h0.6 r90
  text "GP27 / SNS1" at 100.8,166.1 h0.6 r90
  text "GP19 / CONVRUN" at 128.525,164.225 h0.6 r90
  text "GP13 / DATA_RDY" at 126.1,163.8 h0.6 r90
  text "A_IN4" at 79.55,112.85 h0.6
  text "A_IN1" at 135.35,112.85 h0.6
Mechanical 1:
  lines w0.254: 65.194,173.575 65.7,175.1 ; 65.29,112.923 65.8,111.4 ; 65.446,175.1 65.954,175.1 ; 65.546,111.4 66.054,111.4 ; 65.74,149.75 65.7,175.1 ; 65.76,136.75 65.8,111.4 ; 66.21,173.577 65.7,175.1 ; 66.306,112.925 65.8,111.4 ; 76.2,106.096 76.2,106.604 ; 77.724,105.841 76.2,106.35 ; 77.724,106.857 76.2,106.35 ; 100.348,106.341 76.2,106.35 ; 116.396,106.334 140.543,106.325 ; 139.019,105.818 140.543,106.325 ; 139.019,106.834 140.543,106.325 ; 140.543,106.071 140.543,106.579
  text "63.7 (mm)" at 64.826,149.495 h1.52 r270.09
  text "64.343 (mm)" at 100.601,105.426 h1.52 r359.98
Drill Drawing:
  text "Drill Drawing." at 155.88,78.74 h1.52
  text ".LEGEND" at 78.142,73.152 h1.52

## Text inside footprints (layer, text, board x,y; h text height)
P1: Bottom Overlay "1" at 81.915,170.434 h1.27 r180; Bottom Overlay "2" at 81.788,173.355 h1.27 r180; Bottom Overlay "40" at 134.6,174.4 h1.27 r180
U5: Top Overlay "*" at 127.55,150.25 h1.27 r180; Mechanical 13 "*" at 125.92,151.043 h1.27 r180